# Allegro board pc043b_single_maroc_17.brd
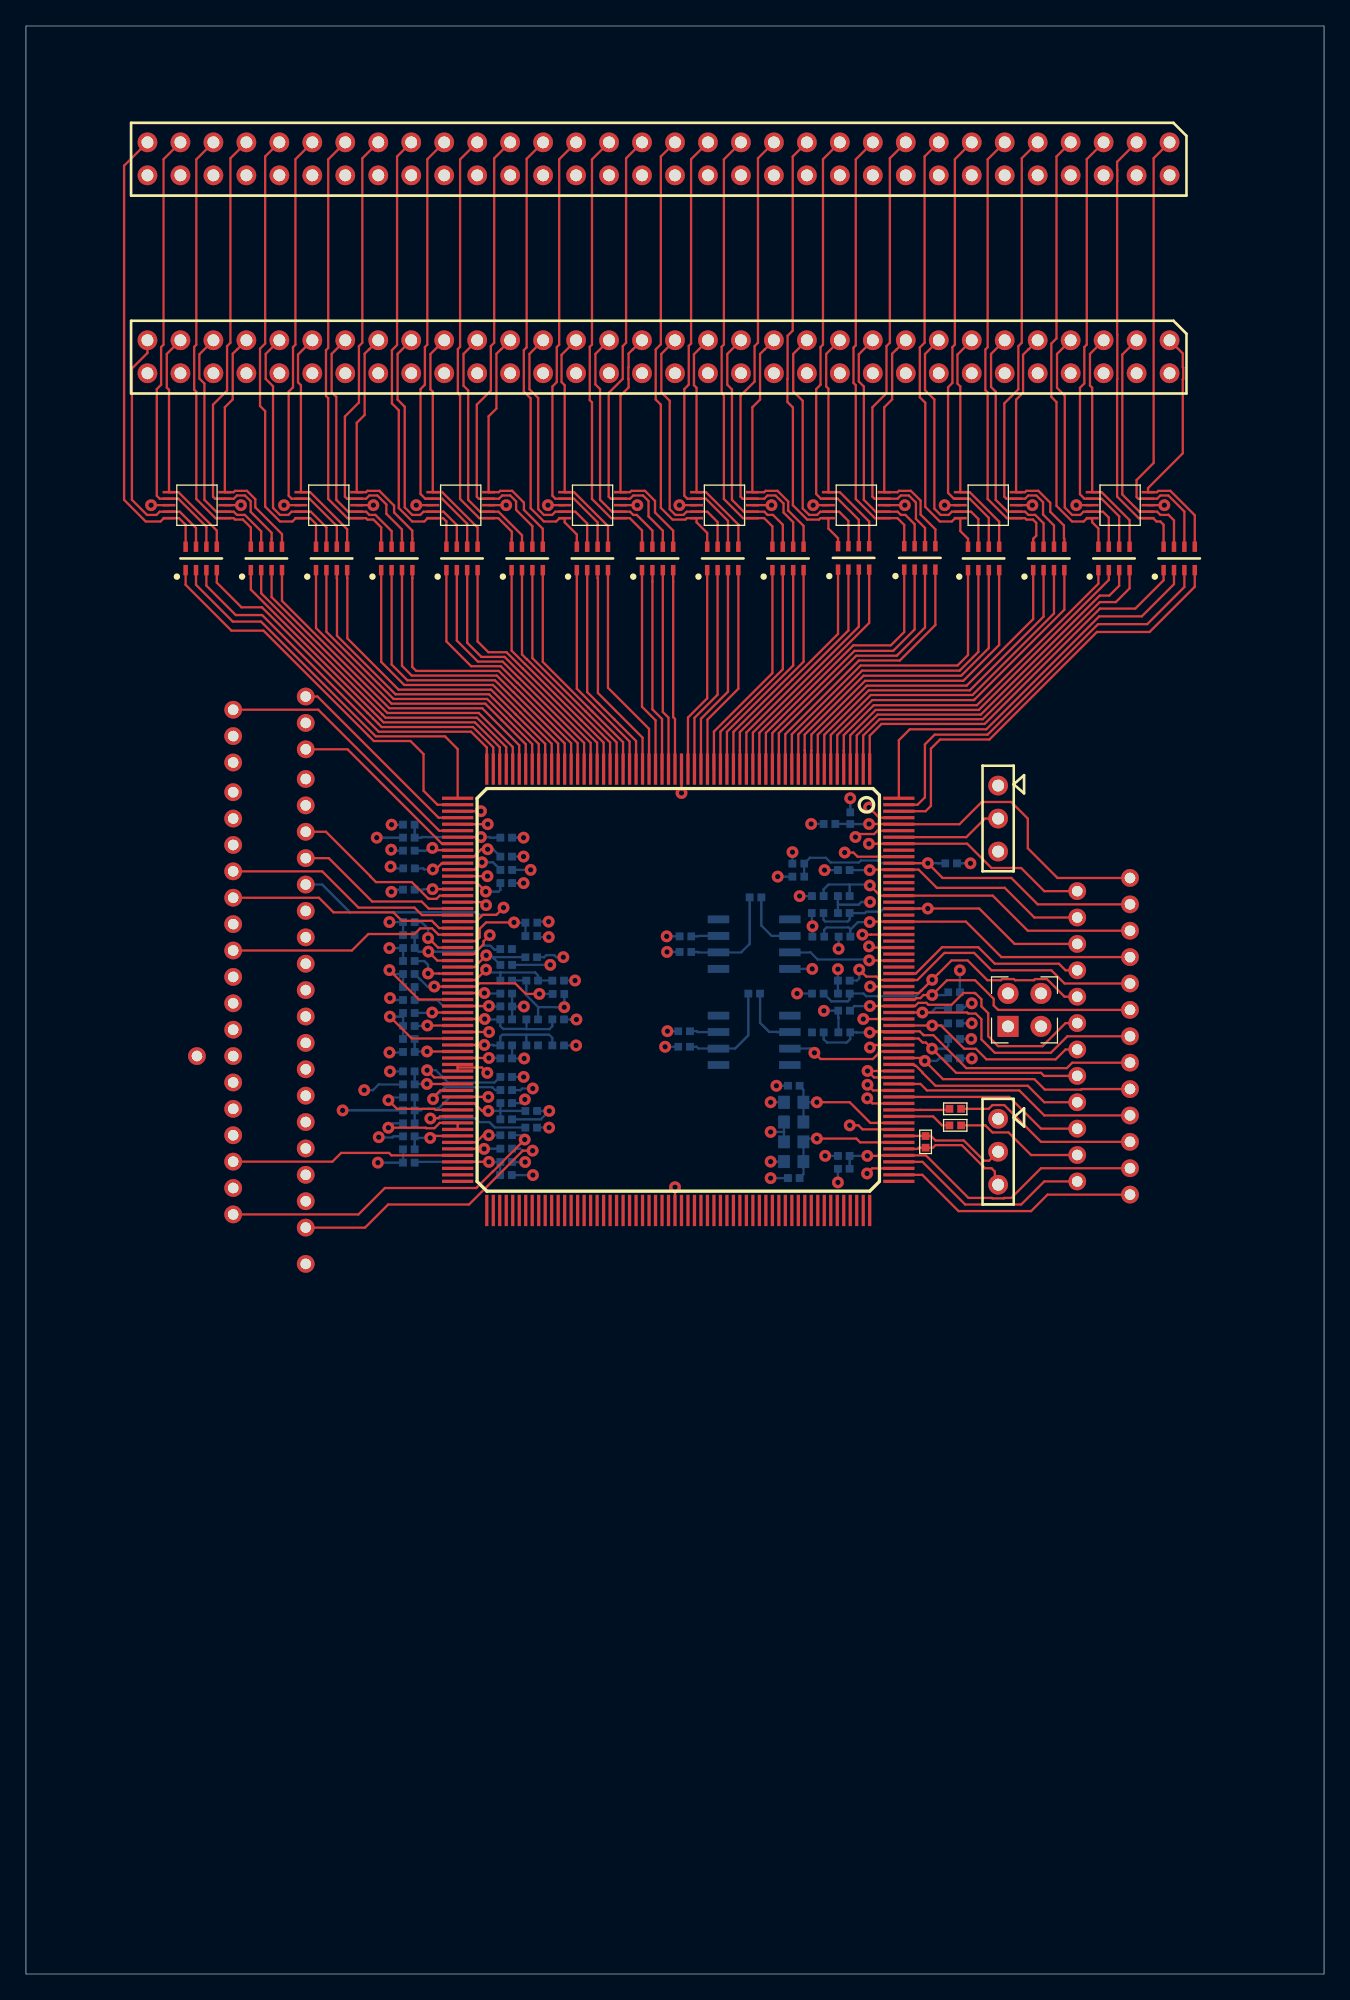
[diagram p0: board, top side]
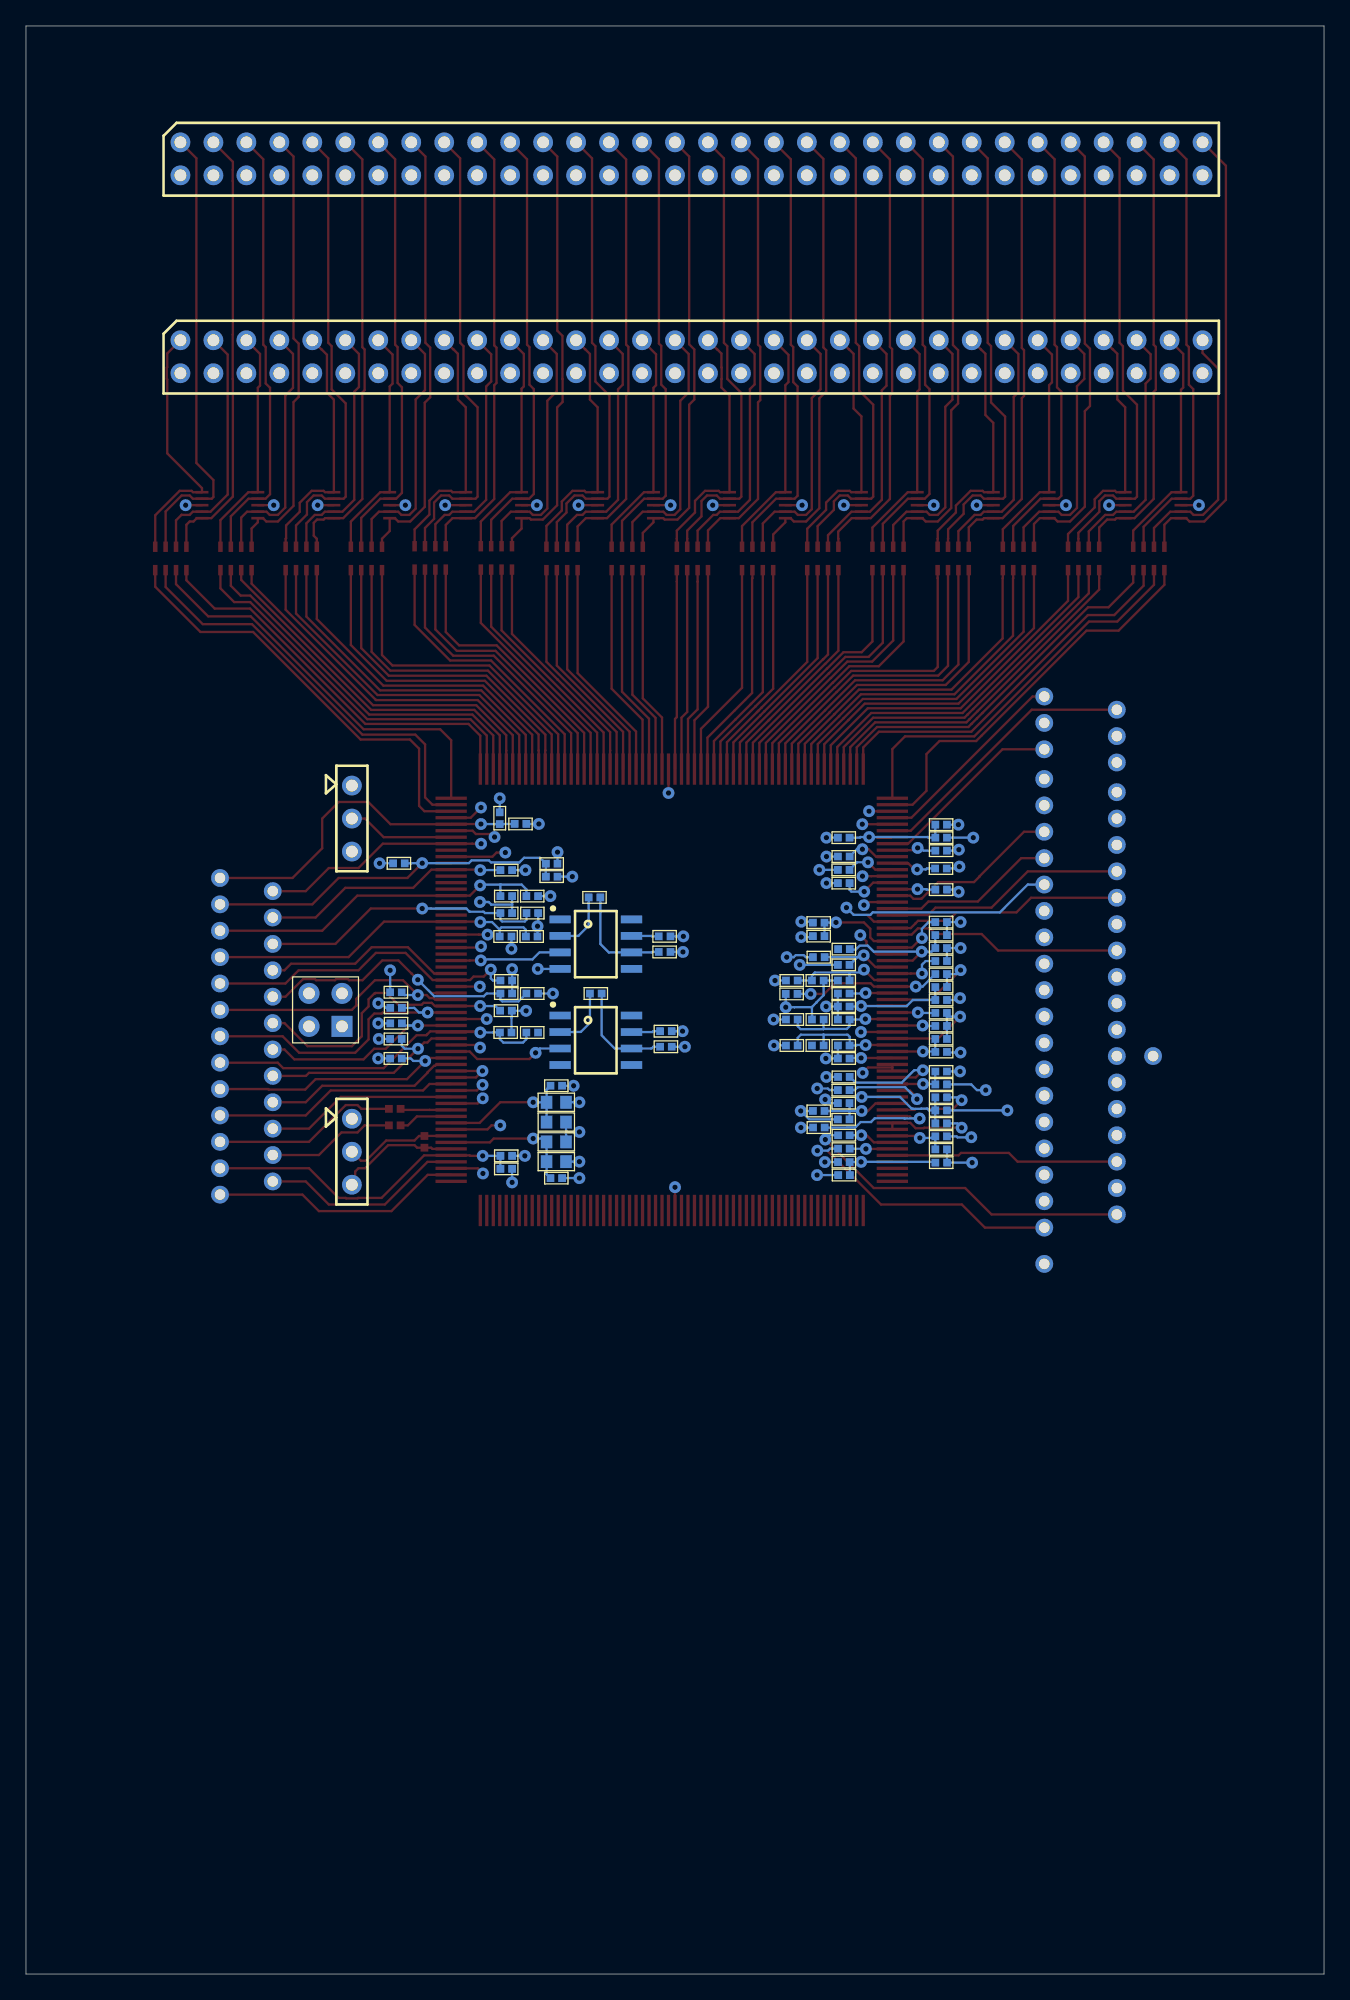
[diagram p1: board, bottom side, seen from below]

Outline 100 x 150 mm; copper layers: TOP, L2, L3, L4, L5, BOTTOM. Coordinates in mm from the lower left corner of the outline.
Outline path: 0,150 100,150 100,0 0,0 0,150

## Design rules (mm)
net group OR: nets OR<0> OR<1>
net group DC_BLOCKED_IN: nets DC_BLOCKED_IN<0> DC_BLOCKED_IN<1> DC_BLOCKED_IN<2> DC_BLOCKED_IN<3> DC_BLOCKED_IN<4> DC_BLOCKED_IN<5> DC_BLOCKED_IN<6> DC_BLOCKED_IN<7> DC_BLOCKED_IN<8> DC_BLOCKED_IN<9> DC_BLOCKED_IN<10> DC_BLOCKED_IN<11> DC_BLOCKED_IN<12> DC_BLOCKED_IN<13> DC_BLOCKED_IN<14> DC_BLOCKED_IN<15> DC_BLOCKED_IN<16> DC_BLOCKED_IN<17> DC_BLOCKED_IN<18> DC_BLOCKED_IN<19> DC_BLOCKED_IN<20> DC_BLOCKED_IN<21> DC_BLOCKED_IN<22> DC_BLOCKED_IN<23> DC_BLOCKED_IN<24> DC_BLOCKED_IN<25> DC_BLOCKED_IN<26> DC_BLOCKED_IN<27> DC_BLOCKED_IN<28> DC_BLOCKED_IN<29> DC_BLOCKED_IN<30> DC_BLOCKED_IN<31> DC_BLOCKED_IN<32> DC_BLOCKED_IN<33> DC_BLOCKED_IN<34> DC_BLOCKED_IN<35> DC_BLOCKED_IN<36> DC_BLOCKED_IN<37> DC_BLOCKED_IN<38> DC_BLOCKED_IN<39> DC_BLOCKED_IN<40> DC_BLOCKED_IN<41> DC_BLOCKED_IN<42> DC_BLOCKED_IN<43> DC_BLOCKED_IN<44> DC_BLOCKED_IN<45> DC_BLOCKED_IN<46> DC_BLOCKED_IN<47> DC_BLOCKED_IN<48> DC_BLOCKED_IN<49> DC_BLOCKED_IN<50> DC_BLOCKED_IN<51> DC_BLOCKED_IN<52> DC_BLOCKED_IN<53> DC_BLOCKED_IN<54> DC_BLOCKED_IN<55> DC_BLOCKED_IN<56> DC_BLOCKED_IN<57> DC_BLOCKED_IN<58> DC_BLOCKED_IN<59> DC_BLOCKED_IN<60> DC_BLOCKED_IN<61> DC_BLOCKED_IN<62> DC_BLOCKED_IN<63>
net group IN: nets IN<0> IN<1> IN<2> IN<3> IN<4> IN<5> IN<6> IN<7> IN<8> IN<9> IN<10> IN<11> IN<12> IN<13> IN<14> IN<15> IN<16> IN<17> IN<18> IN<19> IN<20> IN<21> IN<22> IN<23> IN<24> IN<25> IN<26> IN<27> IN<28> IN<29> IN<30> IN<31> IN<32> IN<33> IN<34> IN<35> IN<36> IN<37> IN<38> IN<39> IN<40> IN<41> IN<42> IN<43> IN<44> IN<45> IN<46> IN<47> IN<48> IN<49> IN<50> IN<51> IN<52> IN<53> IN<54> IN<55> IN<56> IN<57> IN<58> IN<59> IN<60> IN<61> IN<62> IN<63>
net group SUM: nets SUM<1> SUM<2> SUM<3> SUM<4> SUM<5> SUM<6> SUM<7> SUM<8>
net group TRIG: nets TRIG<0> TRIG<1> TRIG<2> TRIG<3> TRIG<4> TRIG<5> TRIG<6> TRIG<7> TRIG<8> TRIG<9> TRIG<10> TRIG<11> TRIG<12> TRIG<13> TRIG<14> TRIG<15> TRIG<16> TRIG<17> TRIG<18> TRIG<19> TRIG<20> TRIG<21> TRIG<22> TRIG<23> TRIG<24> TRIG<25> TRIG<26> TRIG<27> TRIG<28> TRIG<29> TRIG<30> TRIG<31> TRIG<32> TRIG<33> TRIG<34> TRIG<35> TRIG<36> TRIG<37> TRIG<38> TRIG<39> TRIG<40> TRIG<41> TRIG<42> TRIG<43> TRIG<44> TRIG<45> TRIG<46> TRIG<47> TRIG<48> TRIG<49> TRIG<50> TRIG<51> TRIG<52> TRIG<53> TRIG<54> TRIG<55> TRIG<56> TRIG<57> TRIG<58> TRIG<59> TRIG<60> TRIG<61> TRIG<62> TRIG<63>

## Placement (name value [footprint] x y rotation side)
C1  100nF  [C0402]  63 63 180 bottom
C2  100nF  [C0402]  29.5 63.5 0 bottom
C3  100nF  [C0402]  38.92 78.3 180 bottom
C4  100nF  [C0402]  63.5 89 270 bottom
C5  100nF  [C0402]  63 83 0 bottom
C6  100nF  [C0402]  29.5 88.5 0 bottom
C7  100nF  [C0402]  63 81.69 0 bottom
C8  100nF  [C0402]  29.5 87.5 0 bottom
C9  100nF  [C0402]  38.93 79.92 180 bottom
C10  100nF  [C0402]  63.05 79.89 0 bottom
C11  100nF  [C0402]  29.5 72 0 bottom
C12  100nF  [C0402]  63 75.5 0 bottom
C13  100nF  [C0402]  29.5 77 0 bottom
C14  100nF  [C0402]  29.5 69.5 0 bottom
C15  100nF  [C0402]  29.5 67.5 0 bottom
C16  100nF  [C0402]  63.04 72.5 0 bottom
C17  100nF  [C0402]  29.5 65.5 0 bottom
C18  100nF  [C0402]  29.5 86.5 0 bottom
C19  100nF  [C0402]  37 71.5 180 bottom
C20  100nF  [C0402]  29.5 83.5 0 bottom
C21  100nF  [C0402]  37 73.5 180 bottom
C22  100nF  [C0402]  29.5 78 0 bottom
C23  100nF  [C0402]  63.02 74.18 0 bottom
C24  100nF  [C0402]  29.5 80 0 bottom
C25  100nF  [C0402]  71.5 70.5 180 bottom
C26  100nF  [C0402]  29.5 73 0 bottom
C27  100nF  [C0402]  37 75.5 180 bottom
C28  100nF  [C0402]  37 84 180 bottom
C29  100nF  [C0402]  37 76.5 0 bottom
C30  100nF  [C0402]  37 68.06 180 bottom
C31  100nF  [C0402]  71.5 75.6 180 bottom
C32  100nF  [C0402]  37 86.05 180 bottom
C33  100nF  [C0402]  37 74.5 180 bottom
C34  100nF  [C0402]  38.93 66.46 180 bottom
C35  100nF  [C0402]  63 76.5 0 bottom
C36  100nF  [C0402]  37.01 85.02 180 bottom
C37  100nF  [C0402]  71.5 72 180 bottom
C38  100nF  [C0402]  71.27 85.53 180 bottom
C39  100nF  [C0402]  29.51 85.13 0 bottom
C40  100nF  [C0402]  29.5 81 0 bottom
C41  100nF  [C0402]  37 70.5 180 bottom
C42  100nF  [C0402]  71.49 74.39 180 bottom
C43  100nF  [C0402]  63 85 0 bottom
C44  100nF  [C0402]  36.99 62.52 180 bottom
C45  100nF  [C0402]  36.99 69.08 180 bottom
C46  100nF  [C0402]  71.49 73.21 180 bottom
C47  100nF  [C0402]  29.5 74 0 bottom
C48  100nF  [C0402]  50.7 72.6 180 bottom
C49  100nF  [C0402]  50.8 79.9 180 bottom
C50  100nF  [C0402]  59.14 61.28 0 bottom
C51  100nF  [C0402]  59.14 68.4 0 bottom
CN1  100nF/16V  [CAPCAF80P160X320X110-8N]  13.5 109 90 top
CN2  100nF/16V  [CAPCAF80P160X320X110-8N]  18.52 109 90 top
CN3  100nF/16V  [CAPCAF80P160X320X110-8N]  23.55 109 90 top
CN4  100nF/16V  [CAPCAF80P160X320X110-8N]  28.57 109 90 top
CN5  100nF/16V  [CAPCAF80P160X320X110-8N]  33.59 109 90 top
CN6  100nF/16V  [CAPCAF80P160X320X110-8N]  38.61 109 90 top
CN7  100nF/16V  [CAPCAF80P160X320X110-8N]  43.64 109 90 top
CN8  100nF/16V  [CAPCAF80P160X320X110-8N]  48.66 109 90 top
CN9  100nF/16V  [CAPCAF80P160X320X110-8N]  53.68 109 90 top
CN10  100nF/16V  [CAPCAF80P160X320X110-8N]  58.7 109 90 top
CN11  100nF/16V  [CAPCAF80P160X320X110-8N]  63.76 109.04 90 top
CN12  100nF/16V  [CAPCAF80P160X320X110-8N]  68.86 109.04 90 top
CN13  100nF/16V  [CAPCAF80P160X320X110-8N]  73.77 109 90 top
CN14  100nF/16V  [CAPCAF80P160X320X110-8N]  78.8 109 90 top
CN15  100nF/16V  [CAPCAF80P160X320X110-8N]  83.82 109 90 top
CN16  100nF/16V  [CAPCAF80P160X320X110-8N]  88.84 109 90 top
IC1  -  [SOIC127P598X200-8N]  56.1 71.9 180 bottom
IC2  -  [SOIC127P598X200-8N]  56.1 79.3 180 bottom
J1  -  [CONHE13D2X32M]  88.1 141.04 90 top
J2  -  [CONHE13D2X32M]  88.1 125.8 90 top
J3  -  [CONHE13D3X1M]  74.89 65.86 270 top
J4  -  [CONHE13D3X1M]  74.89 91.51 270 top
LK1  -  [1-HOLE_0-8P]  85.05 62.05 0 top
LK2  -  [1-HOLE_0-8P]  21.55 63.57 0 top
LK3  -  [1-HOLE_0-8P]  15.96 86.94 0 top
LK4  -  [1-HOLE_0-8P]  85.05 84.4 0 top
LK5  -  [1-HOLE_0-8P]  85.05 80.33 0 top
LK6  -  [1-HOLE_0-8P]  80.99 83.38 0 top
LK7  -  [1-HOLE_0-8P]  80.99 79.32 0 top
LK8  -  [1-HOLE_0-8P]  15.96 88.97 0 top
LK9  -  [1-HOLE_0-8P]  85.05 78.3 0 top
LK10  -  [1-HOLE_0-8P]  80.99 75.25 0 top
LK11  -  [1-HOLE_0-8P]  15.96 76.78 0 top
LK12  -  [1-HOLE_0-8P]  21.55 69.67 0 top
LK13  -  [1-HOLE_0-8P]  85.05 70.17 0 top
LK14  -  [1-HOLE_0-8P]  15.96 66.62 0 top
LK15  -  [1-HOLE_0-8P]  21.55 61.54 0 top
LK16  -  [1-HOLE_0-8P]  21.55 92.02 0 top
LK17  -  [1-HOLE_0-8P]  15.96 68.65 0 top
LK18  -  [1-HOLE_0-8P]  21.55 89.99 0 top
LK19  -  [1-HOLE_0-8P]  21.55 71.7 0 top
LK20  -  [1-HOLE_0-8P]  21.55 77.79 0 top
LK21  -  [1-HOLE_0-8P]  80.99 73.22 0 top
LK22  -  [1-HOLE_0-8P]  15.96 80.84 0 top
LK23  -  [1-HOLE_0-8P]  85.05 68.14 0 top
LK24  -  [1-HOLE_0-8P]  15.96 72.71 0 top
LK25  -  [1-HOLE_0-8P]  21.55 75.76 0 top
LK26  -  [1-HOLE_0-8P]  85.05 60.01 0 top
LK27  -  [1-HOLE_0-8P]  15.96 70.68 0 top
LK28  -  [1-HOLE_0-8P]  85.05 66.11 0 top
LK29  -  [1-HOLE_0-8P]  80.99 65.09 0 top
LK30  -  [1-HOLE_0-8P]  13.17 70.68 0 top
LK31  -  [1-HOLE_0-8P]  15.96 93.29 0 top
LK32  -  [1-HOLE_0-8P]  21.55 79.83 0 top
LK33  -  [1-HOLE_0-8P]  21.55 65.6 0 top
LK34  -  [1-HOLE_0-8P]  85.05 74.24 0 top
LK35  -  [1-HOLE_0-8P]  21.55 96.34 0 top
LK36  -  [1-HOLE_0-8P]  15.96 74.75 0 top
LK37  -  [1-HOLE_0-8P]  15.96 60.52 0 top
LK38  -  [1-HOLE_0-8P]  85.05 76.27 0 top
LK39  -  [1-HOLE_0-8P]  15.96 95.32 0 top
LK40  -  [1-HOLE_0-8P]  80.99 69.16 0 top
LK41  -  [1-HOLE_0-8P]  85.05 82.37 0 top
LK42  -  [1-HOLE_0-8P]  15.96 91 0 top
LK43  -  [1-HOLE_0-8P]  21.55 81.86 0 top
LK44  -  [1-HOLE_0-8P]  15.96 64.59 0 top
LK45  -  [1-HOLE_0-8P]  85.05 72.21 0 top
LK46  -  [1-HOLE_0-8P]  80.99 81.35 0 top
LK47  -  [1-HOLE_0-8P]  21.55 59.51 0 top
LK48  -  [1-HOLE_0-8P]  21.55 67.63 0 top
LK49  -  [1-HOLE_0-8P]  80.99 71.19 0 top
LK50  -  [1-HOLE_0-8P]  21.55 73.73 0 top
LK51  -  [1-HOLE_0-8P]  80.99 63.06 0 top
LK52  -  [1-HOLE_0-8P]  85.05 64.08 0 top
LK53  -  [1-HOLE_0-8P]  21.55 83.89 0 top
LK54  -  [1-HOLE_0-8P]  15.96 58.49 0 top
LK55  -  [1-HOLE_0-8P]  21.55 54.68 0 top
LK56  -  [1-HOLE_0-8P]  21.55 57.47 0 top
LK57  -  [1-HOLE_0-8P]  21.55 94.3 0 top
LK58  -  [1-HOLE_0-8P]  80.99 77.29 0 top
LK59  -  [1-HOLE_0-8P]  15.96 62.55 0 top
LK60  -  [1-HOLE_0-8P]  21.55 98.37 0 top
LK61  -  [1-HOLE_0-8P]  21.55 87.95 0 top
LK62  -  [1-HOLE_0-8P]  15.96 84.91 0 top
LK63  -  [1-HOLE_0-8P]  80.99 67.13 0 top
LK64  -  [1-HOLE_0-8P]  21.55 85.92 0 top
LK65  -  [1-HOLE_0-8P]  15.96 82.87 0 top
LK66  -  [1-HOLE_0-8P]  15.96 97.35 0 top
LK67  -  [1-HOLE_0-8P]  15.96 78.81 0 top
LK68  -  [1-HOLE_0-8P]  80.99 61.03 0 top
PL1  -  [HEADER2X2_STR]  75.65 72.97 90 bottom
R1  51  [C0402]  71.59 65.35 0 top
R2  51  [C0402]  71.59 66.62 0 top
R3  10R  [C0402]  63 62 180 bottom
R4  10R  [C0402]  29.5 64.5 180 bottom
R5  10R  [C0402]  37 77.71 0 bottom
R6  10R  [C0402]  61.9 88.56 180 bottom
R7  10R  [C0402]  61 83 180 bottom
R8  10R  [C0402]  37 87.5 0 bottom
R9  10R  [C0402]  60.99 81.69 180 bottom
R10  10R  [C0402]  38.93 80.96 0 bottom
R11  10R  [C0402]  61.04 79.89 180 bottom
R12  10R  [C0402]  29.5 71 180 bottom
R13  10R  [C0402]  61 75.5 180 bottom
R14  100  [C0402]  41.02 75.47 0 bottom
R15  10R  [C0402]  29.5 68.5 180 bottom
R16  10R  [C0402]  29.5 66.5 180 bottom
R17  100  [C0402]  61 72.5 180 bottom
R18  51  [C0402]  36.99 64.59 180 bottom
R19  51  [C0402]  36.99 63.55 180 bottom
R20  XX  [C0402]  39 71.5 0 bottom
R21  XX  [C0402]  41 71.5 180 bottom
R22  XX  [C0402]  39 73.5 0 bottom
R23  XX  [C0402]  41 73.5 180 bottom
R24  100  [C0402]  69.3 64.08 270 top
R25  XX  [C0402]  36.99 78.92 0 bottom
R26  XX  [C0402]  29.5 79 0 bottom
R27  1k  [C0402]  38.92 65.18 0 bottom
R28  XX  [C0402]  39 76.5 180 bottom
R29  XX  [C0402]  41 76.5 180 bottom
R30  XX  [C0402]  29.5 75 180 bottom
R31  XX  [C0402]  29.5 76 0 bottom
R32  XX  [C0402]  37 67.06 0 bottom
R33  XX  [C0402]  37 65.81 180 bottom
R34  XX  [C0402]  59.5 85.5 180 bottom
R35  XX  [C0402]  59.5 84.5 0 bottom
R36  XX  [C0402]  36.98 61.52 0 bottom
R37  XX  [C0402]  29.49 62.48 0 bottom
R38  51R  [C0402]  56.1 75.5 180 bottom
R39  51R  [C0402]  56.2 82.9 180 bottom
R40  51R  [C0402]  50.7 71.4 180 bottom
R41  51R  [C0402]  50.8 78.7 180 bottom
R42  XX  [C0603]  59.14 64.08 180 bottom
R43  00  [C0603]  59.14 62.55 0 bottom
R44  680  [C0603]  59.14 65.6 180 bottom
R45  510  [C0603]  59.14 67.13 0 bottom
U1  -  [PQFP240_050]  65 92.78 270 top
U2  -  [SOT552-1]  84.29 113.1 0 top
U3  -  [SOT552-1]  74.13 113.1 0 top
U4  -  [SOT552-1]  63.97 113.1 0 top
U5  -  [SOT552-1]  53.81 113.1 0 top
U6  -  [SOT552-1]  43.65 113.1 0 top
U7  -  [SOT552-1]  33.49 113.1 0 top
U8  -  [SOT552-1]  23.33 113.1 0 top
U9  -  [SOT552-1]  13.17 113.1 0 top

## Library data of the parts
C1-C17 = CAPCERSMDCL2: part number: CAPCERSMDCL2_0402-100NF_X7R,16V; tolerance: 10%
C18-C51 = CAPCERSMDCL2: part number: CAPCERSMDCL2_0402-100NF,16V; tolerance: 10%
CN1-CN16 = CAPN4I: part number: CAPN4I-100NF,16V,X7R,CKCA43
IC1 IC2 = AD8061: part number: AD8061ARZ
J1 J2 = CON64P: part number: CON64P-BARD2X32
J3 J4 = CON3P: part number: CON3P-SIL254D
LK1-LK68 = 1-HOLE: part number: 1-HOLE_0-8-BASE
PL1 = HEADER2X2: part number: HEADER2X2_STR-HARWIN
R1 R2 R18 R19 = RSMD0402: part number: RSMD0402_1/16W-51,1%; tolerance: 1%
R3-R13 R15 R16 = RSMD0402: part number: RSMD0402_1/16W-10R,5%; tolerance: 5%
R14 R17 = RSMD0402: part number: RSMD0402_1/16W-100,0.1%_GEN; tolerance: 0.1%
R20-R23 R25 R26 R28-R37 = RSMD0402: part number: RSMD0402_0.0625W-XX,1%; tolerance: 1%
R24 = RSMD0402: part number: RSMD0402_1/16W-100,1%; tolerance: 1%
R27 = RSMD0402: part number: RSMD0402_1/16W-1K,5%; tolerance: 5%
R38-R41 = RSMD0402: part number: RSMD0402_1/16W-51R,5%; tolerance: 5%
R42 = RSMD0603: part number: RSMD0603_1/10W-XX,1%; tolerance: 1%
R43 = RSMD0603: part number: RSMD0603_-00,
R44 = RSMD0603: part number: RSMD0603_1/10W-680,1%; tolerance: 1%
R45 = RSMD0603: part number: RSMD0603_1/10W-510,1%; tolerance: 1%
U1 = MAROC3: part number: MAROC3_PQFP-IN2P3
U2-U9 = PRTR5V0U8S: part number: PRTR5V0U8S_TSSOP-NXP

## Footprints (pads in the part's own frame, mm; a bottom-side part is the same pattern mirrored in y, then rotated)
1-HOLE_0-8P
  round 1.372 hole 0.813: 1(0,0)
C0402
  rect 0.6x0.6 smd: 1(-0.45,0) 2(0.45,0)
C0603
  rect 0.9x1 smd: 1(-0.75,0) 2(0.75,0)
CAPCAF80P160X320X110-8N
  rect 0.8x0.35 smd: 1(-0.9,1.2) 2(0.9,1.2) 3(-0.9,0.4) 4(0.9,0.4) 5(-0.9,-0.4) 6(0.9,-0.4) 7(-0.9,-1.2) 8(0.9,-1.2)
CONHE13D2X32M
  round 1.524 hole 0.914: 1(0,0) 2(-2.54,0) 3(0,2.54) 4(-2.54,2.54) 5(0,5.08) 6(-2.54,5.08) 7(0,7.62) 8(-2.54,7.62) 9(0,10.16) 10(-2.54,10.16) 11(0,12.7) 12(-2.54,12.7) 13(0,15.24) 14(-2.54,15.24) 15(0,17.78) 16(-2.54,17.78) 17(0,20.32) 18(-2.54,20.32) 19(0,22.86) 20(-2.54,22.86) 21(0,25.4) 22(-2.54,25.4) 23(0,27.94) 24(-2.54,27.94) 25(0,30.48) 26(-2.54,30.48) 27(0,33.02) 28(-2.54,33.02) 29(0,35.56) 30(-2.54,35.56) 31(0,38.1) 32(-2.54,38.1) 33(0,40.64) 34(-2.54,40.64) 35(0,43.18) 36(-2.54,43.18) 37(0,45.72) 38(-2.54,45.72) 39(0,48.26) 40(-2.54,48.26) 41(0,50.8) 42(-2.54,50.8) 43(0,53.34) 44(-2.54,53.34) 45(0,55.88) 46(-2.54,55.88) 47(0,58.42) 48(-2.54,58.42) 49(0,60.96) 50(-2.54,60.96) 51(0,63.5) 52(-2.54,63.5) 53(0,66.04) 54(-2.54,66.04) 55(0,68.58) 56(-2.54,68.58) 57(0,71.12) 58(-2.54,71.12) 59(0,73.66) 60(-2.54,73.66) 61(0,76.2) 62(-2.54,76.2) 63(0,78.74) 64(-2.54,78.74)
CONHE13D3X1M
  round 1.524 hole 0.914: 1(0,0) 2(2.54,0) 3(5.08,0)
HEADER2X2_STR
  rect 1.626x1.626 hole 0.914: 1(0,0)
  round 1.626 hole 0.914: 2(0,2.54) 3(2.54,0) 4(2.54,2.54)
PQFP240_050
  rect 2.413x0.254 smd: 1(0,0) 2(0,-0.5) 3(0,-1) 4(0,-1.5) 5(0,-2) 6(0,-2.5) 7(0,-3) 8(0,-3.5) 9(0,-4) 10(0,-4.5) 11(0,-5) 12(0,-5.5) 13(0,-6) 14(0,-6.5) 15(0,-7) 16(0,-7.5) 17(0,-8) 18(0,-8.5) 19(0,-9) 20(0,-9.5) 21(0,-10) 22(0,-10.5) 23(0,-11) 24(0,-11.5) 25(0,-12) 26(0,-12.5) 27(0,-13) 28(0,-13.5) 29(0,-14) 30(0,-14.5) 31(0,-15) 32(0,-15.5) 33(0,-16) 34(0,-16.5) 35(0,-17) 36(0,-17.5) 37(0,-18) 38(0,-18.5) 39(0,-19) 40(0,-19.5) 41(0,-20) 42(0,-20.5) 43(0,-21) 44(0,-21.5) 45(0,-22) 46(0,-22.5) 47(0,-23) 48(0,-23.5) 49(0,-24) 50(0,-24.5) 51(0,-25) 52(0,-25.5) 53(0,-26) 54(0,-26.5) 55(0,-27) 56(0,-27.5) 57(0,-28) 58(0,-28.5) 59(0,-29) 60(0,-29.5) 121(33.987,-29.5) 122(33.987,-29) 123(33.987,-28.5) 124(33.987,-28) 125(33.987,-27.5) 126(33.987,-27) 127(33.987,-26.5) 128(33.987,-26) 129(33.987,-25.5) 130(33.987,-25) 131(33.987,-24.5) 132(33.987,-24) 133(33.987,-23.5) 134(33.987,-23) 135(33.987,-22.5) 136(33.987,-22) 137(33.987,-21.5) 138(33.987,-21) 139(33.987,-20.5) 140(33.987,-20) 141(33.987,-19.5) 142(33.987,-19) 143(33.987,-18.5) 144(33.987,-18) 145(33.987,-17.5) 146(33.987,-17) 147(33.987,-16.5) 148(33.987,-16) 149(33.987,-15.5) 150(33.987,-15) 151(33.987,-14.5) 152(33.987,-14) 153(33.987,-13.5) 154(33.987,-13) 155(33.987,-12.5) 156(33.987,-12) 157(33.987,-11.5) 158(33.987,-11) 159(33.987,-10.5) 160(33.987,-10) 161(33.987,-9.5) 162(33.987,-9) 163(33.987,-8.5) 164(33.987,-8) 165(33.987,-7.5) 166(33.987,-7) 167(33.987,-6.5) 168(33.987,-6) 169(33.987,-5.5) 170(33.987,-5) 171(33.987,-4.5) 172(33.987,-4) 173(33.987,-3.5) 174(33.987,-3) 175(33.987,-2.5) 176(33.987,-2) 177(33.987,-1.5) 178(33.987,-1) 179(33.987,-0.5) 180(33.987,0)
  rect 0.254x2.413 smd: 61(2.244,-31.744) 62(2.744,-31.744) 63(3.244,-31.744) 64(3.744,-31.744) 65(4.244,-31.744) 66(4.744,-31.744) 67(5.244,-31.744) 68(5.744,-31.744) 69(6.244,-31.744) 70(6.744,-31.744) 71(7.244,-31.744) 72(7.744,-31.744) 73(8.243,-31.744) 74(8.743,-31.744) 75(9.243,-31.744) 76(9.743,-31.744) 77(10.243,-31.744) 78(10.743,-31.744) 79(11.243,-31.744) 80(11.743,-31.744) 81(12.243,-31.744) 82(12.743,-31.744) 83(13.243,-31.744) 84(13.743,-31.744) 85(14.243,-31.744) 86(14.743,-31.744) 87(15.243,-31.744) 88(15.743,-31.744) 89(16.244,-31.744) 90(16.744,-31.744) 91(17.244,-31.744) 92(17.744,-31.744) 93(18.244,-31.744) 94(18.744,-31.744) 95(19.244,-31.744) 96(19.744,-31.744) 97(20.244,-31.744) 98(20.744,-31.744) 99(21.244,-31.744) 100(21.744,-31.744) 101(22.244,-31.744) 102(22.744,-31.744) 103(23.244,-31.744) 104(23.744,-31.744) 105(24.244,-31.744) 106(24.744,-31.744) 107(25.244,-31.744) 108(25.744,-31.744) 109(26.244,-31.744) 110(26.744,-31.744) 111(27.244,-31.744) 112(27.744,-31.744) 113(28.244,-31.744) 114(28.744,-31.744) 115(29.244,-31.744) 116(29.744,-31.744) 117(30.244,-31.744) 118(30.744,-31.744) 119(31.244,-31.744) 120(31.744,-31.744) 181(31.744,2.244) 182(31.244,2.244) 183(30.744,2.244) 184(30.244,2.244) 185(29.744,2.244) 186(29.244,2.244) 187(28.744,2.244) 188(28.244,2.244) 189(27.744,2.244) 190(27.244,2.244) 191(26.744,2.244) 192(26.244,2.244) 193(25.744,2.244) 194(25.244,2.244) 195(24.744,2.244) 196(24.244,2.244) 197(23.744,2.244) 198(23.244,2.244) 199(22.744,2.244) 200(22.244,2.244) 201(21.744,2.244) 202(21.244,2.244) 203(20.744,2.244) 204(20.244,2.244) 205(19.744,2.244) 206(19.244,2.244) 207(18.744,2.244) 208(18.244,2.244) 209(17.744,2.244) 210(17.244,2.244) 211(16.744,2.244) 212(16.244,2.244) 213(15.743,2.244) 214(15.243,2.244) 215(14.743,2.244) 216(14.243,2.244) 217(13.743,2.244) 218(13.243,2.244) 219(12.743,2.244) 220(12.243,2.244) 221(11.743,2.244) 222(11.243,2.244) 223(10.743,2.244) 224(10.243,2.244) 225(9.743,2.244) 226(9.243,2.244) 227(8.743,2.244) 228(8.243,2.244) 229(7.744,2.244) 230(7.244,2.244) 231(6.744,2.244) 232(6.244,2.244) 233(5.744,2.244) 234(5.244,2.244) 235(4.744,2.244) 236(4.244,2.244) 237(3.744,2.244) 238(3.244,2.244) 239(2.744,2.244) 240(2.244,2.244)
SOIC127P598X200-8N
  rect 1.65x0.6 smd: 1(-2.75,1.905) 2(-2.75,0.635) 3(-2.75,-0.635) 4(-2.75,-1.905) 5(2.75,-1.905) 6(2.75,-0.635) 7(2.75,0.635) 8(2.75,1.905)
SOT552-1
  rect 1x0.2 smd: 1(-2.15,1) 2(-2.15,0.5) 3(-2.15,0) 4(-2.15,-0.5) 5(-2.15,-1) 6(2.15,-1) 7(2.15,-0.5) 8(2.15,0) 9(2.15,0.5) 10(2.15,1)

## Nets
AVDD: C29.2(B<0>) C48.1(A<0>) C49.1(A<0>) IC1.7(PVS) IC2.7(PVS) R5.2(B<0>) R6.2(B<0>) R7.2(B<0>) R8.2(B<0>) R9.2(B<0>) R10.2(B<0>) R11.2(B<0>) R12.2(B<0>) R13.2(B<0>) R14.2(B<0>) R15.2(B<0>) R16.2(B<0>) R17.2(B<0>) R20.2(B<0>) R22.2(B<0>) R25.2(B<0>) R27.2(B<0>) R28.2(B<0>) R30.2(B<0>) R32.2(B<0>) R34.2(B<0>) R36.2(B<0>)
DVDD: R3.2(B<0>) R4.2(B<0>) R42.2(B<0>) R44.2(B<0>)
GND_SIGNAL: C1.2(B<0>) C2.1(A<0>) C3.1(A<0>) C4.1(A<0>) C5.1(A<0>) C6.1(A<0>) C7.1(A<0>) C8.1(A<0>) C9.1(A<0>) C10.1(A<0>) C11.1(A<0>) C12.1(A<0>) C13.1(A<0>) C14.1(A<0>) C15.1(A<0>) C16.1(A<0>) C17.1(A<0>) C18.1(A<0>) C19.1(A<0>) C20.1(A<0>) C21.1(A<0>) C22.1(A<0>) C23.1(A<0>) C24.1(A<0>) C25.1(A<0>) C26.1(A<0>) C27.1(A<0>) C28.1(A<0>) C30.1(A<0>) C31.1(A<0>) C32.1(A<0>) C33.1(A<0>) C34.1(A<0>) C35.1(A<0>) C36.1(A<0>) C37.1(A<0>) C38.1(A<0>) C39.1(A<0>) C40.1(A<0>) C41.1(A<0>) C42.1(A<0>) C43.1(A<0>) C44.1(A<0>) C45.1(A<0>) C46.1(A<0>) C47.1(A<0>) C48.2(B<0>) C49.2(B<0>) C50.1(A<0>) C51.1(A<0>) IC1.4(MVS) IC2.4(MVS) J1.2(A<1>) J1.4(A<3>) J1.6(A<5>) J1.8(A<7>) J1.10(A<9>) J1.12(A<11>) J1.14(A<13>) J1.16(A<15>) J1.18(A<17>) J1.20(A<19>) J1.22(A<21>) J1.24(A<23>) J1.26(A<25>) J1.28(A<27>) J1.30(A<29>) J1.32(A<31>) J1.34(A<33>) J1.36(A<35>) J1.38(A<37>) J1.40(A<39>) J1.42(A<41>) J1.44(A<43>) J1.46(A<45>) J1.48(A<47>) J1.50(A<49>) J1.52(A<51>) J1.54(A<53>) J1.56(A<55>) J1.58(A<57>) J1.60(A<59>) J1.62(A<61>) J1.64(A<63>) J2.2(A<1>) J2.4(A<3>) J2.6(A<5>) J2.8(A<7>) J2.10(A<9>) J2.12(A<11>) J2.14(A<13>) J2.16(A<15>) J2.18(A<17>) J2.20(A<19>) J2.22(A<21>) J2.24(A<23>) J2.26(A<25>) J2.28(A<27>) J2.30(A<29>) J2.32(A<31>) J2.34(A<33>) J2.36(A<35>) J2.38(A<37>) J2.40(A<39>) J2.42(A<41>) J2.44(A<43>) J2.46(A<45>) J2.48(A<47>) J2.50(A<49>) J2.52(A<51>) J2.54(A<53>) J2.56(A<55>) J2.58(A<57>) J2.60(A<59>) J2.62(A<61>) J2.64(A<63>) J3.1(A<0>) J4.3(A<2>) LK30.1(A<0>) LK55.1(A<0>) PL1.2(B1<0>) PL1.4(B2<0>) R21.1(A<0>) R23.1(A<0>) R26.1(A<0>) R29.1(A<0>) R31.1(A<0>) R33.1(A<0>) R35.1(A<0>) R37.1(A<0>) R43.1(A<0>) R45.1(A<0>) U1.30(GND_PA2) U1.63(GND_PA) U1.65(VSSA) U1.73(GND_NMOS) U1.77(GND_W) U1.85(GND_DAC) U1.92(E_FSU) U1.98(GND_WILK) U1.102(VSSA2) U1.103(VSSM) U1.109(GND_DISCRI) U1.111(VSSD) U1.112(GNDD) U1.150(VSSD2) U1.183(GNDD2) U1.189(VSSD3) U1.195(GND_DISCRI2) U1.197(VSSM2) U1.198(VSS) U1.202(GND_FSU) U1.206(GND_FSB1) U1.211(GND_FSB0) U1.217(GND_CAPA) U1.219(GND_SS) U1.227(GND_OTAG) U1.231(GND_NMOS2) U1.235(VSSI) U1.237(GND_PA3) U2.3 U2.8 U3.3 U3.8 U4.3 U4.8 U5.3 U5.8 U6.3 U6.8 U7.3 U7.8 U8.3 U8.8 U9.3 U9.8
VDD_BUF1: C7.2(B<0>) LK7.1(A<0>) R9.1(A<0>) U1.223(VDD_BUF1)
VDD_DAC: C3.2(B<0>) LK3.1(A<0>) R5.1(A<0>) U1.87(VDD_DAC)
VDD_DISCRI: C14.2(B<0>) LK14.1(A<0>) R15.1(A<0>) U1.105(VDD_DISCRI)
VDD_DISCRIADC: C15.2(B<0>) C17.2(B<0>) LK15.1(A<0>) R16.1(A<0>) U1.107(VDD_DISCRIADC) U1.193(VDD_DISCRIADC2)
VDD_FSB: C12.2(B<0>) LK10.1(A<0>) R13.1(A<0>) U1.210(VDD_FSB)
VDD_FSU1: C13.2(B<0>) LK11.1(A<0>) R14.1(A<0>) U1.90(VDD_FSU1)
VDD_FSU2: C16.2(B<0>) LK13.1(A<0>) R17.1(A<0>) U1.204(VDD_FSU2)
VDD_OTAG: C5.2(B<0>) LK5.1(A<0>) R7.1(A<0>) U1.225(VDD_OTAG)
VDD_PA: C6.2(B<0>) C8.2(B<0>) LK6.1(A<0>) R8.1(A<0>) U1.67(VDD_PA) U1.233(VDD_PA2)
VDD_PAD: C4.2(B<0>) LK4.1(A<0>) R6.1(A<0>) U1.236(VDD_PAD)
VDD_SS: C10.2(B<0>) LK9.1(A<0>) R11.1(A<0>) U1.221(VDD_SS)
VDD_W: C9.2(B<0>) LK8.1(A<0>) R10.1(A<0>) U1.83(VDD_W)
VDD_WILK: C11.2(B<0>) LK12.1(A<0>) R12.1(A<0>) U1.100(VDD_WILK)
VDDD: C1.1(A<0>) LK1.1(A<0>) R3.1(A<0>) U1.185(VDDD)
VDDD2: C2.2(B<0>) LK2.1(A<0>) R4.1(A<0>) U1.113(VDDD2)
ADC_DAV: LK54.1(A<0>) R18.1(A<0>)
BUF_OUT_FS: PL1.1(A1<0>) R40.2(B<0>)
BUF_OUT_Q: PL1.3(A2<0>) R41.2(B<0>)
CK_40M: J3.2(A<1>) R24.1(A<0>) U1.188(CK_40M)
CK_R: LK64.1(A<0>) U1.78(CK_R)
CK_SC: LK57.1(A<0>) U1.68(CK_SC)
CKB_40M: J3.3(A<2>) R24.2(B<0>) U1.186(CKB_40M)
CTEST: J4.1(A<0>)
D_R: LK67.1(A<0>) U1.82(D_R)
D_SC: LK60.1(A<0>) U1.64(D_SC)
DC_BLOCKED_IN<0>: CN16.7(A<0>) U1.238(IN0)
DC_BLOCKED_IN<1>: CN16.5(A<0>) U1.239(IN1)
DC_BLOCKED_IN<2>: CN16.3(A<0>) U1.240(IN2)
DC_BLOCKED_IN<3>: CN16.1(A<0>) U1.1(IN3)
DC_BLOCKED_IN<4>: CN15.7(A<0>) U1.2(IN4)
DC_BLOCKED_IN<5>: CN15.5(A<0>) U1.3(IN5)
DC_BLOCKED_IN<6>: CN15.3(A<0>) U1.4(IN6)
DC_BLOCKED_IN<7>: CN15.1(A<0>) U1.5(IN7)
DC_BLOCKED_IN<8>: CN14.7(A<0>) U1.6(IN8)
DC_BLOCKED_IN<9>: CN14.5(A<0>) U1.7(IN9)
DC_BLOCKED_IN<10>: CN14.3(A<0>) U1.8(IN10)
DC_BLOCKED_IN<11>: CN14.1(A<0>) U1.9(IN11)
DC_BLOCKED_IN<12>: CN13.7(A<0>) U1.10(IN12)
DC_BLOCKED_IN<13>: CN13.5(A<0>) U1.11(IN13)
DC_BLOCKED_IN<14>: CN13.3(A<0>) U1.12(IN14)
DC_BLOCKED_IN<15>: CN13.1(A<0>) U1.13(IN15)
DC_BLOCKED_IN<16>: CN12.7(A<0>) U1.14(IN16)
DC_BLOCKED_IN<17>: CN12.5(A<0>) U1.15(IN17)
DC_BLOCKED_IN<18>: CN12.3(A<0>) U1.16(IN18)
DC_BLOCKED_IN<19>: CN12.1(A<0>) U1.17(IN19)
DC_BLOCKED_IN<20>: CN11.7(A<0>) U1.18(IN20)
DC_BLOCKED_IN<21>: CN11.5(A<0>) U1.19(IN21)
DC_BLOCKED_IN<22>: CN11.3(A<0>) U1.20(IN22)
DC_BLOCKED_IN<23>: CN11.1(A<0>) U1.21(IN23)
DC_BLOCKED_IN<24>: CN10.7(A<0>) U1.22(IN24)
DC_BLOCKED_IN<25>: CN10.5(A<0>) U1.23(IN25)
DC_BLOCKED_IN<26>: CN10.3(A<0>) U1.24(IN26)
DC_BLOCKED_IN<27>: CN10.1(A<0>) U1.25(IN27)
DC_BLOCKED_IN<28>: CN9.7(A<0>) U1.26(IN28)
DC_BLOCKED_IN<29>: CN9.5(A<0>) U1.27(IN29)
DC_BLOCKED_IN<30>: CN9.3(A<0>) U1.28(IN30)
DC_BLOCKED_IN<31>: CN9.1(A<0>) U1.29(IN31)
DC_BLOCKED_IN<32>: CN8.7(A<0>) U1.31(IN32)
DC_BLOCKED_IN<33>: CN8.5(A<0>) U1.32(IN33)
DC_BLOCKED_IN<34>: CN8.3(A<0>) U1.33(IN34)
DC_BLOCKED_IN<35>: CN8.1(A<0>) U1.34(IN35)
DC_BLOCKED_IN<36>: CN7.7(A<0>) U1.35(IN36)
DC_BLOCKED_IN<37>: CN7.5(A<0>) U1.36(IN37)
DC_BLOCKED_IN<38>: CN7.3(A<0>) U1.37(IN38)
DC_BLOCKED_IN<39>: CN7.1(A<0>) U1.38(IN39)
DC_BLOCKED_IN<40>: CN6.7(A<0>) U1.39(IN40)
DC_BLOCKED_IN<41>: CN6.5(A<0>) U1.40(IN41)
DC_BLOCKED_IN<42>: CN6.3(A<0>) U1.41(IN42)
DC_BLOCKED_IN<43>: CN6.1(A<0>) U1.42(IN43)
DC_BLOCKED_IN<44>: CN5.7(A<0>) U1.43(IN44)
DC_BLOCKED_IN<45>: CN5.5(A<0>) U1.44(IN45)
DC_BLOCKED_IN<46>: CN5.3(A<0>) U1.45(IN46)
DC_BLOCKED_IN<47>: CN5.1(A<0>) U1.46(IN47)
DC_BLOCKED_IN<48>: CN4.7(A<0>) U1.47(IN48)
DC_BLOCKED_IN<49>: CN4.5(A<0>) U1.48(IN49)
DC_BLOCKED_IN<50>: CN4.3(A<0>) U1.49(IN50)
DC_BLOCKED_IN<51>: CN4.1(A<0>) U1.50(IN51)
DC_BLOCKED_IN<52>: CN3.7(A<0>) U1.51(IN52)
DC_BLOCKED_IN<53>: CN3.5(A<0>) U1.52(IN53)
DC_BLOCKED_IN<54>: CN3.3(A<0>) U1.53(IN54)
DC_BLOCKED_IN<55>: CN3.1(A<0>) U1.54(IN55)
DC_BLOCKED_IN<56>: CN2.7(A<0>) U1.55(IN56)
DC_BLOCKED_IN<57>: CN2.5(A<0>) U1.56(IN57)
DC_BLOCKED_IN<58>: CN2.3(A<0>) U1.57(IN58)
DC_BLOCKED_IN<59>: CN2.1(A<0>) U1.58(IN59)
DC_BLOCKED_IN<60>: CN1.7(A<0>) U1.59(IN60)
DC_BLOCKED_IN<61>: CN1.5(A<0>) U1.60(IN61)
DC_BLOCKED_IN<62>: CN1.3(A<0>) U1.61(IN62)
DC_BLOCKED_IN<63>: CN1.1(A<0>) U1.62(IN63)
EN_OTAG: LK58.1(A<0>) U1.213(EN_OTAG)
G_DIODE: C27.2(B<0>) LK25.1(A<0>) U1.91(G_DIODE)
HOLD1: LK62.1(A<0>) U1.79(HOLD1)
HOLD2: LK65.1(A<0>) U1.81(HOLD2)
IB_INTEG: C41.2(B<0>) LK44.1(A<0>) U1.101(IB_INTEG)
IB_SUM: C35.2(B<0>) LK38.1(A<0>) U1.212(IB_SUM)
IB_W: C31.2(B<0>) LK34.1(A<0>) U1.209(IB_W)
IBI_BUF: C28.2(B<0>) LK31.1(A<0>) U1.74(IBI_BUF)
IBI_SS: C32.2(B<0>) LK35.1(A<0>) U1.70(IBI_SS)
IBO_DAC: C40.2(B<0>) LK43.1(A<0>) U1.84(IBO_DAC)
IBO_SS: C36.2(B<0>) LK39.1(A<0>) U1.72(IBO_SS)
IN<0>: CN16.8(B<0>) J2.1(A<0>) U2.10(IN)
IN<1>: CN16.6(B<0>) J1.1(A<0>) U2.9(IN)
IN<2>: CN16.4(B<0>) J2.3(A<2>) U2.7(IN)
IN<3>: CN16.2(B<0>) J1.3(A<2>) U2.6(IN)
IN<4>: CN15.8(B<0>) J2.5(A<4>) U2.1(IN)
IN<5>: CN15.6(B<0>) J1.5(A<4>) U2.2(IN)
IN<6>: CN15.4(B<0>) J2.7(A<6>) U2.4(IN)
IN<7>: CN15.2(B<0>) J1.7(A<6>) U2.5(IN)
IN<8>: CN14.8(B<0>) J2.9(A<8>) U3.10(IN)
IN<9>: CN14.6(B<0>) J1.9(A<8>) U3.9(IN)
IN<10>: CN14.4(B<0>) J2.11(A<10>) U3.7(IN)
IN<11>: CN14.2(B<0>) J1.11(A<10>) U3.6(IN)
IN<12>: CN13.8(B<0>) J2.13(A<12>) U3.1(IN)
IN<13>: CN13.6(B<0>) J1.13(A<12>) U3.2(IN)
IN<14>: CN13.4(B<0>) J2.15(A<14>) U3.4(IN)
IN<15>: CN13.2(B<0>) J1.15(A<14>) U3.5(IN)
IN<16>: CN12.8(B<0>) J2.17(A<16>) U4.10(IN)
IN<17>: CN12.6(B<0>) J1.17(A<16>) U4.9(IN)
IN<18>: CN12.4(B<0>) J2.19(A<18>) U4.7(IN)
IN<19>: CN12.2(B<0>) J1.19(A<18>) U4.6(IN)
IN<20>: CN11.8(B<0>) J2.21(A<20>) U4.1(IN)
IN<21>: CN11.6(B<0>) J1.21(A<20>) U4.2(IN)
IN<22>: CN11.4(B<0>) J2.23(A<22>) U4.4(IN)
IN<23>: CN11.2(B<0>) J1.23(A<22>) U4.5(IN)
IN<24>: CN10.8(B<0>) J2.25(A<24>) U5.10(IN)
IN<25>: CN10.6(B<0>) J1.25(A<24>) U5.9(IN)
IN<26>: CN10.4(B<0>) J2.27(A<26>) U5.7(IN)
IN<27>: CN10.2(B<0>) J1.27(A<26>) U5.6(IN)
IN<28>: CN9.8(B<0>) J2.29(A<28>) U5.1(IN)
IN<29>: CN9.6(B<0>) J1.29(A<28>) U5.2(IN)
IN<30>: CN9.4(B<0>) J2.31(A<30>) U5.4(IN)
IN<31>: CN9.2(B<0>) J1.31(A<30>) U5.5(IN)
IN<32>: CN8.8(B<0>) J2.33(A<32>) U6.10(IN)
IN<33>: CN8.6(B<0>) J1.33(A<32>) U6.9(IN)
IN<34>: CN8.4(B<0>) J2.35(A<34>) U6.7(IN)
IN<35>: CN8.2(B<0>) J1.35(A<34>) U6.6(IN)
IN<36>: CN7.8(B<0>) J2.37(A<36>) U6.1(IN)
IN<37>: CN7.6(B<0>) J1.37(A<36>) U6.2(IN)
IN<38>: CN7.4(B<0>) J2.39(A<38>) U6.4(IN)
IN<39>: CN7.2(B<0>) J1.39(A<38>) U6.5(IN)
IN<40>: CN6.8(B<0>) J2.41(A<40>) U7.10(IN)
IN<41>: CN6.6(B<0>) J1.41(A<40>) U7.9(IN)
IN<42>: CN6.4(B<0>) J2.43(A<42>) U7.7(IN)
IN<43>: CN6.2(B<0>) J1.43(A<42>) U7.6(IN)
IN<44>: CN5.8(B<0>) J2.45(A<44>) U7.1(IN)
IN<45>: CN5.6(B<0>) J1.45(A<44>) U7.2(IN)
IN<46>: CN5.4(B<0>) J2.47(A<46>) U7.4(IN)
IN<47>: CN5.2(B<0>) J1.47(A<46>) U7.5(IN)
IN<48>: CN4.8(B<0>) J2.49(A<48>) U8.10(IN)
IN<49>: CN4.6(B<0>) J1.49(A<48>) U8.9(IN)
IN<50>: CN4.4(B<0>) J2.51(A<50>) U8.7(IN)
IN<51>: CN4.2(B<0>) J1.51(A<50>) U8.6(IN)
IN<52>: CN3.8(B<0>) J2.53(A<52>) U8.1(IN)
IN<53>: CN3.6(B<0>) J1.53(A<52>) U8.2(IN)
IN<54>: CN3.4(B<0>) J2.55(A<54>) U8.4(IN)
IN<55>: CN3.2(B<0>) J1.55(A<54>) U8.5(IN)
IN<56>: CN2.8(B<0>) J2.57(A<56>) U9.10(IN)
IN<57>: CN2.6(B<0>) J1.57(A<56>) U9.9(IN)
IN<58>: CN2.4(B<0>) J2.59(A<58>) U9.7(IN)
IN<59>: CN2.2(B<0>) J1.59(A<58>) U9.6(IN)
IN<60>: CN1.8(B<0>) J2.61(A<60>) U9.1(IN)
IN<61>: CN1.6(B<0>) J1.61(A<60>) U9.2(IN)
IN<62>: CN1.4(B<0>) J2.63(A<62>) U9.4(IN)
IN<63>: CN1.2(B<0>) J1.63(A<62>) U9.5(IN)
IREF_DAC: C24.2(B<0>) LK22.1(A<0>) R25.1(A<0>) R26.2(B<0>) U1.86(IREF_DAC)
OR<0>: LK51.1(A<0>) R1.2(B<0>)
OR<1>: LK52.1(A<0>) R2.2(B<0>)
OUT_ADC: LK56.1(A<0>) R19.1(A<0>)
OUT_FS: IC1.3(PIN) U1.201(OUT_FS)
OUT_Q: IC2.3(PIN) U1.215(OUT_Q)
PWR_ON: R27.1(A<0>) U1.110(PWR_ON)
QBUF_R: LK61.1(A<0>) U1.76(QBUF_R)
QBUF_SC: LK63.1(A<0>) U1.199(QBUF_SC)
RAMP: LK27.1(A<0>) U1.97(RAMP)
RSTB_R: LK53.1(A<0>) U1.80(RSTB_R)
RSTN_ADC: LK68.1(A<0>) U1.184(RSTN_ADC)
RSTN_SC: LK66.1(A<0>) U1.66(RSTN_SC)
START_ADCB: LK59.1(A<0>) U1.116(START_ADCB)
SUM<1>: U1.228(SUM1)
SUM<2>: U1.226(SUM2)
SUM<3>: U1.224(SUM3)
SUM<4>: U1.222(SUM4)
SUM<5>: U1.220(SUM5)
SUM<6>: U1.218(SUM6)
SUM<7>: U1.216(SUM7)
SUM<8>: U1.214(SUM8)
TRIG<0>: LK26.1(A<0>) U1.182(OUT0)
TRIG<1>: U1.181(OUT1)
TRIG<2>: U1.180(OUT2)
TRIG<3>: U1.179(OUT3)
TRIG<4>: U1.178(OUT4)
TRIG<5>: U1.177(OUT5)
TRIG<6>: U1.176(OUT6)
TRIG<7>: U1.175(OUT7)
TRIG<8>: U1.174(OUT8)
TRIG<9>: U1.173(OUT9)
TRIG<10>: U1.172(OUT10)
TRIG<11>: U1.171(OUT11)
TRIG<12>: U1.170(OUT12)
TRIG<13>: U1.169(OUT13)
TRIG<14>: U1.168(OUT14)
TRIG<15>: U1.167(OUT15)
TRIG<16>: U1.166(OUT16)
TRIG<17>: U1.165(OUT17)
TRIG<18>: U1.164(OUT18)
TRIG<19>: U1.163(OUT19)
TRIG<20>: U1.162(OUT20)
TRIG<21>: U1.161(OUT21)
TRIG<22>: U1.160(OUT22)
TRIG<23>: U1.159(OUT23)
TRIG<24>: U1.158(OUT24)
TRIG<25>: U1.157(OUT25)
TRIG<26>: U1.156(OUT26)
TRIG<27>: U1.155(OUT27)
TRIG<28>: U1.154(OUT28)
TRIG<29>: U1.153(OUT29)
TRIG<30>: U1.152(OUT30)
TRIG<31>: U1.151(OUT31)
TRIG<32>: U1.149(OUT32)
TRIG<33>: U1.148(OUT33)
TRIG<34>: U1.147(OUT34)
TRIG<35>: U1.146(OUT35)
TRIG<36>: U1.145(OUT36)
TRIG<37>: U1.144(OUT37)
TRIG<38>: U1.143(OUT38)
TRIG<39>: U1.142(OUT39)
TRIG<40>: U1.141(OUT40)
TRIG<41>: U1.140(OUT41)
TRIG<42>: U1.139(OUT42)
TRIG<43>: U1.138(OUT43)
TRIG<44>: U1.137(OUT44)
TRIG<45>: U1.136(OUT45)
TRIG<46>: U1.135(OUT46)
TRIG<47>: U1.134(OUT47)
TRIG<48>: U1.133(OUT48)
TRIG<49>: U1.132(OUT49)
TRIG<50>: U1.131(OUT50)
TRIG<51>: U1.130(OUT51)
TRIG<52>: U1.129(OUT52)
TRIG<53>: U1.128(OUT53)
TRIG<54>: U1.127(OUT54)
TRIG<55>: U1.126(OUT55)
TRIG<56>: U1.125(OUT56)
TRIG<57>: U1.124(OUT57)
TRIG<58>: U1.123(OUT58)
TRIG<59>: U1.122(OUT59)
TRIG<60>: U1.121(OUT60)
TRIG<61>: U1.120(OUT61)
TRIG<62>: U1.119(OUT62)
TRIG<63>: U1.118(OUT63)
UNNAMED_1_MAROC3_I1_OR0: R1.1(A<0>) U1.191(OR_0)
UNNAMED_1_MAROC3_I1_OR1: R2.1(A<0>) U1.192(OR_1)
UNNAMED_3_CON3P_I231_A: J4.2(A<1>) U1.234(CTEST)
UNNAMED_3_MAROC3_I1_ADCDAV: R18.2(B<0>) U1.114(ADC_DAV)
UNNAMED_3_MAROC3_I1_OUTADC: R19.2(B<0>) U1.115(OUT_ADC)
UNNAMED_8_AD8061_I1_MIN: IC1.2(MIN) R38.1(A<0>)
UNNAMED_8_AD8061_I1_VOUT: IC1.6(VOUT) R38.2(B<0>) R40.1(A<0>)
UNNAMED_8_AD8061_I11_MIN: IC2.2(MIN) R39.1(A<0>)
UNNAMED_8_AD8061_I11_VOUT: IC2.6(VOUT) R39.2(B<0>) R41.1(A<0>)
V_BG: C25.2(B<0>) LK23.1(A<0>) U1.200(V_BG)
VB_OTAFSU: C37.2(B<0>) LK40.1(A<0>) U1.203(VB_OTAFSU)
VBI_DISCRI: C45.2(B<0>) LK48.1(A<0>) U1.104(VBI_DISCRI)
VBI_DISCRIADC: C44.2(B<0>) LK47.1(A<0>) R36.1(A<0>) R37.2(B<0>) U1.117(VBI_DISCRIADC)
VBI_FSB: C42.2(B<0>) LK45.1(A<0>) U1.207(VBI_FSB)
VBI_PA: C38.2(B<0>) LK41.1(A<0>) R34.1(A<0>) R35.2(B<0>) U1.230(VBI_PA)
VBI_TZ: C29.1(A<0>) LK32.1(A<0>) R28.1(A<0>) R29.2(B<0>) U1.89(VBI_TZ)
VBM_DISCRI: C30.2(B<0>) LK33.1(A<0>) U1.106(VBM_DISCRI)
VBO_DISCRI: C34.2(B<0>) LK37.1(A<0>) R32.1(A<0>) R33.2(B<0>) U1.108(VBO_DISCRI)
VBO_FSB: C46.2(B<0>) LK49.1(A<0>) U1.205(VBO_FSB)
VBO_TZ: C33.2(B<0>) LK36.1(A<0>) R30.1(A<0>) R31.2(B<0>) U1.93(VBO_TZ)
VCASC_FSU: C47.2(B<0>) LK50.1(A<0>) U1.94(VCASC_FSU)
VCASC_NMOS: C43.2(B<0>) LK46.1(A<0>) U1.229(VCASC_NMOS)
VCASC_PMOS: C39.2(B<0>) LK42.1(A<0>) U1.71(VCASC_PMOS)
VGAIN_PA: C18.2(B<0>) LK16.1(A<0>) U1.69(VGAIN_PA)
VH: C51.2(B<0>) R44.1(A<0>) R45.2(B<0>) U1.190(VH)
VL: C50.2(B<0>) R42.1(A<0>) R43.2(B<0>) U1.187(VL)
VREF_DAC: C22.2(B<0>) LK20.1(A<0>) U1.88(VREF_DAC)
VREF_FSB: C23.2(B<0>) LK21.1(A<0>) U1.208(VREF_FSB)
VREF_FSU: C26.2(B<0>) LK24.1(A<0>) U1.96(VREF_FSU)
VREF_RAMP: C19.2(B<0>) LK17.1(A<0>) R20.1(A<0>) R21.2(B<0>) U1.99(VREF_RAMP)
VREF_SS: C20.2(B<0>) LK18.1(A<0>) U1.75(VREF_SS)
VSLOPE: C21.2(B<0>) LK19.1(A<0>) R22.1(A<0>) R23.2(B<0>) U1.95(VSLOPE)
VTH0: LK28.1(A<0>) U1.196(VTH0)
VTH1: LK29.1(A<0>) U1.194(VTH1)

Pads without a net: IC1 1 5 8; IC2 1 5 8; U1 232

## Via types
v1: diameter 0.914, hole 0.406, TOP to BOTTOM, 164 vias

## Routing (per net, layer and track width the routed paths; a pad name or vN(x,y) marks a point on that pad's centre or on a via; arc(x,y) is an arc through that point)
AVDD: length 36
  BOTTOM w0.18: R15.2 27.17,68.5 26.73,68.06 v1(26.06,68.06) ; R32.2 38.15,67.06 v1(38.43,67.34) ; C49.1 51.77,79.9 51.8,79.94 53.35,79.94 ; v1(24.4,66.5) R16.2 ; R8.2 v1(38.33,87.5) ; R34.2 v1(59.05,86.38) ; C29.2 R28.2 38.55,75.37 39.11,74.81 39.11,74.8 39.45,74.46 39.45,74.45 ; R5.2 v1(40.39,77.71) ; R27.2 v1(40.3,65.18) ; R10.2 39.46,81.03 v1(40.27,81.03) ; R30.2 28.19,75 v1(28.05,75.15) ; R12.2 29.01,70.96 v1(28,70.96) ; IC1.7 51.73,72.53 51.67,72.6 C48.1 ; R9.2 60.54,80.73 v1(60.59,80.68) R11.2 ; R36.2 v1(39.06,61.52) ; R13.2 v1(59.41,75.5) ; 39.45,74.45 40.79,74.45 40.79,74.44 v1(41.47,74.44) R14.2 ; 39.45,74.45 R22.2 ; R7.2 v1(59.6,83) ; R6.2 v1(60.49,88.56)
DVDD: length 5.5
  BOTTOM w0.18: v1(27.18,64.43) 27.59,64.43 27.61,64.42 28.23,64.42 28.31,64.5 R4.2 ; R3.2 v1(62.55,60.96) ; 58.39,64.84 v1(57.37,64.84) ; 58.39,64.84 R44.2 ; 58.39,64.84 R42.2
GND_SIGNAL: length 171.4
  TOP w0.18: U7.3 v1(30.07,113.1) ; U1.202 65.21,71.54 v1(65.02,71.34) ; U1.231 64.06,86.04 63.75,86.35 v1(63.07,86.35) ; v1(35.55,84.53) 34.88,84.53 34.88,84.54 U1.73 ; v1(64.8,61.64) 65.19,62.04 U1.183 ; U5.8 v1(57.44,113.1) ; 33.26,65.49 33.2,65.54 31.88,65.54 31.46,65.13 30.84,65.13 30.8,65.17 v1(27.92,65.17) ; 33.26,65.49 U1.111 ; 33.26,65.49 U1.112 ; U1.198 v1(64.83,69.54) 65.33,69.04 U1.197 ; 33.26,69.8 35.13,69.8 v1(35.54,69.39) ; 33.26,69.8 U1.102 ; 33.26,69.8 U1.103 ; U1.63 v1(35.05,89.54) ; U1.206 v1(64.5,73.54) ; v1(64.43,80.03) 65.11,80.03 65.11,80.04 U1.219 ; U1.65 v1(35.57,88.54) ; v1(64.95,89.82) 65.73,89.04 U1.237 ; U9.8 v1(16.56,113.1) ; U1.235 65.6,88.04 65.34,87.78 64.13,87.78 v1(63.9,87.55) ; U9.3 v1(9.64,113.1) ; U8.8 v1(26.76,113.1) ; v1(64.83,68.47) 64.83,68.47 65.26,68.04 U1.195 ; U1.30 v1(50.5,90.94) ; v1(28.04,73.72) 29.72,72.04 U1.98 ; v1(27.92,67.28) 28.58,66.62 31.46,66.62 31.55,66.54 U1.109 ; U8.3 v1(19.88,113.1) ; U1.189 64.45,65.04 64.14,65.35 v1(63.46,65.35) ; v1(28,77.3) 30.26,75.04 U1.92 ; U1.217 65.04,79.04 v1(64.95,79.13) ; U3.8 v1(77.53,113.1) ; U6.8 v1(47.1,113.1) ; U7.8 v1(37,113.1) ; U2.8 v1(87.7,113.1) ; v1(35.73,79.99) 35.25,79.52 35.25,79.29 34.5,78.54 U1.85 ; U4.3 v1(60.64,113.1) ; v1(35.45,82.31) 35.44,82.31 35.21,82.54 U1.77 ; U1.150 v1(50,60.58) ; U4.8 v1(67.71,113.1) ; U2.3 v1(80.91,113.1) ; U1.211 v1(65.04,76.04) ; U6.3 v1(40.21,113.1) ; U3.3 v1(70.77,113.1) ; U5.3 v1(50.34,113.1)
  BOTTOM w0.18: C37.1 v1(72.82,72) ; C18.1 28.21,86.5 v1(28.13,86.58) ; R31.1 C13.1 28.3,77 v1(28,77.3) ; C11.1 C26.1 29.05,73.67 ; C50.1 v1(57.37,61.28) ; 29.05,73.67 C47.1 ; 29.05,73.67 29,73.72 v1(28.04,73.72) ; v1(28.15,83.33) 28.32,83.5 C20.1 ; 62.55,82.34 62.55,82.34 64.16,82.34 64.16,82.35 64.35,82.55 v1(65.03,82.55) ; 62.55,82.34 62.55,82.48 62.55,82.48 C5.1 ; 62.55,82.34 C7.1 ; v1(27.92,65.17) 28.25,65.5 C17.1 ; C25.1 v1(72.87,70.5) ; C32.1 v1(38.33,86.05) ; v1(27.11,62.48) R37.1 29.05,62.49 C2.1 ; C4.1 v1(63.5,90.54) ; R21.1 v1(42.38,71.5) ; C10.1 v1(62.6,78.94) ; v1(27.92,67.28) 28.13,67.5 C15.1 ; R43.1 v1(57.37,62.55) ; C12.1 C35.1 v1(62.55,77.38) ; C36.1 v1(38.88,85.02) ; C19.1 C41.1 v1(38.38,70.5) ; C16.1 62.59,73.64 62.57,73.66 C23.1 v1(61.47,74.17) ; v1(72.86,73.21) C46.1 ; C8.1 v1(27.02,87.5) ; C28.1 v1(38.33,84) ; v1(72.86,74.75) 72.61,74.75 72.25,74.39 C42.1 ; C21.1 C33.1 ; C33.1 C27.1 ; C33.1 v1(38.36,74.5) ; C43.1 v1(61.52,85) ; v1(71.94,77.29) 71.94,76.12 71.95,76.12 C31.1 ; v1(28,79) R26.1 C22.1 ; C44.1 v1(38.46,62.52) ; C9.1 39.46,79.85 v1(40.28,79.85) ; C14.1 v1(28.04,69.5) ; C3.1 39.93,78.3 40.08,78.45 40.7,78.45 40.86,78.3 v1(41.4,78.3) ; R29.1 v1(42.3,76.5) ; C38.1 v1(72.76,85.53) ; R33.1 39.67,65.81 v1(40.31,66.46) C34.1 ; C49.2 v1(49.36,79.9) ; IC2.4 v1(60.57,77.39) ; C45.1 v1(38.34,69.08) ; C39.1 28.23,85.13 v1(28.09,85.27) ; v1(39.04,68.19) 38.22,68.19 38.1,68.06 C30.1 ; C48.2 v1(49.42,72.6) ; C6.1 v1(28.17,88.5) ; C24.1 C40.1 v1(28,81) ; R23.1 v1(42.41,73.5) ; R45.1 v1(57.37,67.13) ; C51.1 v1(57.81,68.4) ; C1.2 v1(61.57,63) ; R35.1 v1(57.91,84.5)
VDD_BUF1: length 24.2
  TOP w0.18: LK7.1 76.16,79.32 73.44,82.04 v1(69.47,82.04) 68.8,82.04 68.79,82.04 U1.223
  BOTTOM w0.18: R9.1 61.44,81.18 61.57,81.05 63.32,81.05 63.45,81.18 C7.2 64.64,81.69 64.74,81.8 65.83,81.8 66.07,82.04 v1(69.47,82.04)
VDD_DAC: length 30.1
  TOP w0.18: U1.87 34.56,77.54 v1(35.46,78.44)
  L3 w0.18: LK3.1 22.82,86.94 27.12,82.64 29.92,82.64 34.12,78.44 v1(35.46,78.44)
  BOTTOM w0.18: R5.1 36.1,78.16 36.09,78.16 35.81,78.44 v1(35.46,78.44) 35.6,78.3 C3.2
VDD_DISCRI: length 20.4
  TOP w0.18: v1(30.89,68.54) U1.105
  L3 w0.18: v1(30.89,68.54) 30.33,67.98 27.5,67.98 26.51,66.98 25.11,66.98 24.71,67.38 24.09,67.38 23.33,66.62 LK14.1
  BOTTOM w0.18: v1(30.89,68.54) 29.99,68.54 R15.1 C14.2
VDD_DISCRIADC: length 61.1
  TOP w0.18: U1.107 v1(35.62,67.54) ; U1.193 65.2,67.04 v1(64.81,67.43)
  L3 w0.18: v1(64.81,67.43) 63.08,69.16 55.84,69.16 54.11,67.43 39.88,67.43 38.9,66.45 37.99,66.45 36.91,67.54 v1(35.62,67.54) 29.62,61.54 LK15.1
  BOTTOM w0.18: C15.2 R16.1 ; R16.1 30.44,66.5 30.58,66.64 31.03,66.64 31.05,66.62 31.67,66.62 31.68,66.64 31.77,66.64 32.67,67.54 v1(35.62,67.54) ; R16.1 C17.2
VDD_FSB: length 25.8
  TOP w0.18: U1.210 68.78,75.54 68.99,75.74 69,75.74 v1(69.81,76.56) 70.29,77.04 70.29,77.04 71.31,78.05 72.54,78.05 74.07,76.52 75.11,76.52 75.2,76.61 76.11,76.61 76.2,76.52 77.65,76.52 77.74,76.61 78.65,76.61 80.01,75.25 LK10.1
  BOTTOM w0.18: v1(69.81,76.56) 68.54,75.29 64.73,75.29 64.52,75.5 C12.2 63.45,75.03 63.31,74.89 62.06,74.89 R13.1
VDD_FSU1: length 27.3
  TOP w0.18: v1(39.55,75.47) 38.5,75.47 37.69,76.28 34.93,76.28 34.68,76.04 U1.90 v1(31.45,76.04)
  L3 w0.18: LK11.1 25.44,76.78 25.62,76.6 29.11,76.6 29.68,76.04 v1(31.45,76.04)
  BOTTOM w0.18: v1(31.45,76.04) 30.92,76.04 30.41,76.55 30.4,76.55 C13.2 ; R14.1 v1(39.55,75.47)
VDD_FSU2: length 28.4
  TOP w0.18: LK13.1 80.6,70.17 80.18,69.75 72.44,69.75 69.91,72.29 69.15,72.29 69.1,72.34 68.86,72.59 65.09,72.59 65.04,72.54 ; 65.04,72.54 U1.204 ; 65.04,72.54 v1(65,72.5)
  BOTTOM w0.18: R17.1 61.45,71.98 61.71,71.72 63.23,71.72 63.49,71.99 C16.2 64.01,72.5 64.01,72.5 v1(65,72.5)
VDD_OTAG: length 26.6
  TOP w0.18: v1(65.01,83.82) 65.8,83.04 U1.225 74.48,83.04 77.18,80.33 LK5.1
  BOTTOM w0.18: v1(65.01,83.82) 64.95,83.89 63.44,83.89 ; R7.1 61.45,83.52 61.82,83.89 63.44,83.89 ; 63.44,83.89 63.45,83.88 C5.2
VDD_PA: length 58.3
  TOP w0.18: v1(64.94,87.03) 65.61,87.03 65.62,87.04 U1.233 72.51,87.04 74.38,85.16 76.67,85.16 78.45,83.38 LK6.1 ; v1(35.05,87.55) 34.73,87.55 34.72,87.54 U1.67
  L3 w0.18: v1(35.05,87.55) 36.17,87.55 36.92,86.8 38.71,86.8 39.85,85.66 61.19,85.66 61.23,85.7 61.81,85.7 61.85,85.66 63.57,85.66 v1(64.94,87.03)
  BOTTOM w0.18: C6.2 C8.2 30.47,87.5 30.51,87.55 v1(35.05,87.55) 35.72,87.55 35.77,87.5 R8.1
VDD_PAD: length 27.2
  TOP w0.18: LK4.1 79.46,84.4 77.18,86.68 77.18,88.97 75.9,90.25 73.63,90.25 71.92,88.54 U1.236 67.23,88.55 v1(64.95,88.55)
  BOTTOM w0.18: v1(64.95,88.55) C4.2 R6.1
VDD_SS: length 26.2
  TOP w0.18: LK9.1 75.15,78.3 72.41,81.04 U1.221 65.04,81.04 v1(65,81)
  BOTTOM w0.18: R11.1 61.49,80.41 61.67,80.59 63.38,80.59 63.5,80.47 63.5,80.41 ; v1(65,81) 64.1,81 63.5,80.41 ; C10.2 63.5,80.41
VDD_W: length 32.2
  TOP w0.18: U1.83 34.68,79.54 34.96,79.81 34.96,80.48 35.45,80.97 v1(37.6,80.97)
  L3 w0.18: v1(37.6,80.97) 32.6,80.97 29.37,84.2 27.39,84.2 22.62,88.97 LK8.1
  BOTTOM w0.18: C9.2 R10.1 37.96,80.96 37.95,80.97 v1(37.6,80.97)
VDD_WILK: length 14.2
  TOP w0.18: U1.100 v1(30.9,71.04)
  L3 w0.18: LK12.1 24.09,69.67 24.69,70.26 28.96,70.26 29.73,71.04 v1(30.9,71.04)
  BOTTOM w0.18: C11.2 R12.1 29.99,71.04 v1(30.9,71.04)
VDDD: length 25
  TOP w0.18: LK1.1 78.19,62.05 75.91,59.76 75.36,59.76 75.33,59.72 74.46,59.72 74.42,59.76 72.61,59.76 69.33,63.04 U1.185 65.82,63.04 65.78,63 v1(64.82,63)
  BOTTOM w0.18: v1(64.82,63) C1.1 R3.1
VDDD2: length 14.3
  TOP w0.18: v1(31.14,64.38) 31.29,64.53 31.54,64.53 31.54,64.54 U1.113
  L3 w0.18: v1(31.14,64.38) 28.92,64.38 28.11,63.57 LK2.1
  BOTTOM w0.18: C2.2 R4.1 30.07,64.38 v1(31.14,64.38)
ADC_DAV: length 26
  TOP w0.18: v1(38.42,64.25) 36.41,62.24 36.41,62.23 35.97,61.79 35.96,61.79 34.69,60.52 27.65,60.52 25.62,58.49 LK54.1
  BOTTOM w0.18: R18.1 38.09,64.59 v1(38.42,64.25)
BUF_OUT_FS: length 30
  L3 w0.18: v1(49.24,71.4) 49.68,71.84 49.68,71.88 52.61,74.8 60.47,74.8 60.92,75.25 68.8,75.25 69.32,74.73 69.34,74.73 70.09,73.98 74.64,73.98 PL1.1
  BOTTOM w0.18: R40.2 v1(49.24,71.4)
BUF_OUT_Q: length 29.1
  L3 w0.18: PL1.3 74.64,76.52 70.83,76.52 70.1,77.26 69.52,77.26 69.05,76.78 64.61,76.78 64.48,76.65 51.44,76.65 v1(49.39,78.7)
  BOTTOM w0.18: R41.2 v1(49.39,78.7)
CK_40M: length 8.9
  TOP w0.18: J3.2 74.2,62.62 73.81,62.62 72.25,64.18 70.07,64.18 69.72,64.53 69.48,64.53 ; 69.48,64.53 R24.1 ; 69.48,64.53 69.47,64.54 U1.188
CK_R: length 13.3
  TOP w0.18: U1.78 31.03,82.04 30.48,82.58 26.67,82.58 23.33,85.92 LK64.1
CK_SC: length 14.7
  TOP w0.18: LK57.1 24.77,94.3 32.04,87.04 U1.68
CKB_40M: length 9.5
  TOP w0.18: J3.3 74.64,61.03 74.64,61.79 74.38,62.05 73.88,62.05 72.1,63.82 70.07,63.82 69.87,63.63 R24.2 68.79,63.63 68.7,63.54 U1.186
D_R: length 18.2
  TOP w0.18: LK67.1 25.11,78.81 26.38,80.08 29.93,80.08 30.37,80.52 31.29,80.52 31.77,80.04 U1.82
D_SC: length 15.6
  TOP w0.18: LK60.1 22.45,98.37 31.79,89.04 U1.64
DC_BLOCKED_IN<0>: length 33.8
  TOP w0.18: U1.238 69.3,89.54 69.71,89.95 69.71,94.35 70.42,95.06 74.22,95.06 82.5,103.34 86.56,103.34 90.04,106.82 CN16.7
DC_BLOCKED_IN<1>: length 32.6
  TOP w0.18: CN16.5 89.24,106.8 86.38,103.94 82.59,103.94 74.08,95.43 70.01,95.43 69.25,94.68 69.25,90.6 68.69,90.04 U1.239
DC_BLOCKED_IN<2>: length 31.7
  TOP w0.18: CN16.3 88.44,107.02 85.96,104.54 82.68,104.54 73.99,95.84 68.09,95.84 67.24,95 U1.240
DC_BLOCKED_IN<3>: length 30.9
  TOP w0.18: CN16.1 87.64,107.32 85.46,105.14 82.74,105.14 73.86,96.26 65.91,96.26 65,95.35 U1.1
DC_BLOCKED_IN<4>: length 29.2
  TOP w0.18: CN15.7 85.02,106.7 83.96,105.64 82.73,105.64 73.71,96.62 65.76,96.62 64.5,95.36 U1.2
DC_BLOCKED_IN<5>: length 28.8
  TOP w0.18: U1.3 64,95.37 65.61,96.98 73.56,96.98 82.72,106.14 83.46,106.14 84.22,106.9 CN15.5
DC_BLOCKED_IN<6>: length 28.2
  TOP w0.18: CN15.3 83.42,107.35 73.41,97.34 65.46,97.34 63.5,95.38 U1.4
DC_BLOCKED_IN<7>: length 28.1
  TOP w0.18: CN15.1 82.62,107.06 73.26,97.7 65.31,97.7 63,95.39 63,94.2 U1.5
DC_BLOCKED_IN<8>: length 27.2
  TOP w0.18: U1.6 62.5,95.4 65.2,98.09 73.03,98.09 73.06,98.12 73.07,98.12 80,105.05 CN14.7
DC_BLOCKED_IN<9>: length 27
  TOP w0.18: U1.7 62,95.41 65.08,98.48 72.92,98.48 79.2,104.76 CN14.5
DC_BLOCKED_IN<10>: length 26.9
  TOP w0.18: U1.8 61.5,95.42 64.93,98.84 72.72,98.84 78.4,104.52 CN14.3
DC_BLOCKED_IN<11>: length 26.7
  TOP w0.18: U1.9 61,95.42 64.78,99.2 72.46,99.2 77.6,104.34 CN14.1
DC_BLOCKED_IN<12>: length 25.7
  TOP w0.18: U1.10 60.5,94.2 60.51,94.21 60.51,95.44 64.65,99.58 72.21,99.58 74.97,102.34 CN13.7
DC_BLOCKED_IN<13>: length 25.6
  TOP w0.18: CN13.5 74.17,102.1 72.05,99.97 64.53,99.97 59.99,95.43 59.99,94.22 60,94.2 U1.11
DC_BLOCKED_IN<14>: length 25.5
  TOP w0.18: U1.12 59.5,95.45 64.41,100.36 71.93,100.36 73.37,101.81 CN13.3
DC_BLOCKED_IN<15>: length 25.3
  TOP w0.18: CN13.1 72.57,101.56 71.76,100.75 64.29,100.75 59,95.46 U1.13
DC_BLOCKED_IN<16>: length 22
  TOP w0.18: U1.14 58.5,95.47 64.17,101.14 67.32,101.14 70.06,103.88 CN12.7
DC_BLOCKED_IN<17>: length 21.9
  TOP w0.18: U1.15 58,95.55 63.96,101.51 67.09,101.51 69.26,103.68 CN12.5
DC_BLOCKED_IN<18>: length 21.6
  TOP w0.18: U1.16 57.5,95.56 63.83,101.88 66.81,101.88 68.46,103.53 CN12.3
DC_BLOCKED_IN<19>: length 21.5
  TOP w0.18: CN12.1 67.66,103.34 66.63,102.31 63.74,102.31 57,95.57 U1.17
DC_BLOCKED_IN<20>: length 18.9
  TOP w0.18: U1.18 56.5,95.58 64.96,104.04 CN11.7
DC_BLOCKED_IN<21>: length 18.7
  TOP w0.18: CN11.5 64.16,103.75 56,95.59 U1.19
DC_BLOCKED_IN<22>: length 18.6
  TOP w0.18: U1.20 55.5,95.6 63.36,103.46 CN11.3
DC_BLOCKED_IN<23>: length 18.5
  TOP w0.18: U1.21 55,94.2 55,94.21 55,95.63 58.63,99.26 62.56,103.19 CN11.1
DC_BLOCKED_IN<24>: length 17.6
  TOP w0.18: CN10.7 59.9,101.04 54.5,95.64 U1.22
DC_BLOCKED_IN<25>: length 17.4
  TOP w0.18: U1.23 54,95.65 59.1,100.75 CN10.5
DC_BLOCKED_IN<26>: length 17.3
  TOP w0.18: CN10.3 58.3,100.46 53.5,95.66 U1.24
DC_BLOCKED_IN<27>: length 17.2
  TOP w0.18: CN10.1 57.5,100.17 53,95.67 U1.25
DC_BLOCKED_IN<28>: length 16.3
  TOP w0.18: CN9.7 54.88,98.97 52.5,96.59 U1.26
DC_BLOCKED_IN<29>: length 16.2
  TOP w0.18: CN9.5 54.08,98.74 52,96.66 U1.27
DC_BLOCKED_IN<30>: length 16.1
  TOP w0.18: U1.28 51.5,96.73 53.28,98.51 CN9.3
DC_BLOCKED_IN<31>: length 15.9
  TOP w0.18: U1.29 51,96.75 52.48,98.23 CN9.1
DC_BLOCKED_IN<32>: length 15.4
  TOP w0.18: U1.31 50,96.64 49.86,96.78 49.86,107.22 49.86,107.22 CN8.7
DC_BLOCKED_IN<33>: length 15.5
  TOP w0.18: CN8.5 49.06,97.18 49.5,96.74 U1.32
DC_BLOCKED_IN<34>: length 15.6
  TOP w0.18: CN8.3 48.26,107.22 48.26,107.22 48.26,97.38 49,96.64 U1.33
DC_BLOCKED_IN<35>: length 15.8
  TOP w0.18: CN8.1 47.46,97.58 48.5,96.54 U1.34
DC_BLOCKED_IN<36>: length 16.6
  TOP w0.18: U1.35 48,95.88 44.84,99.04 CN7.7
DC_BLOCKED_IN<37>: length 16.8
  TOP w0.18: CN7.5 44.04,107.48 44.06,107.46 44.06,98.64 44.6,98.1 45.4,97.3 47.5,95.2 U1.36
DC_BLOCKED_IN<38>: length 16.9
  TOP w0.18: U1.37 47,94.94 45.35,96.59 44.2,97.74 44.1,97.84 43.99,97.95 43.24,98.7 CN7.3
DC_BLOCKED_IN<39>: length 17
  TOP w0.18: U1.38 46.5,94.9 43.81,97.59 43.81,97.59 42.44,98.97 CN7.1
DC_BLOCKED_IN<40>: length 17.9
  TOP w0.18: CN6.7 39.81,101.03 43.32,97.53 43.56,97.29 43.69,97.16 46,94.85 U1.39
DC_BLOCKED_IN<41>: length 18
  TOP w0.18: CN6.5 39.01,101.32 43.11,97.22 45.5,94.84 U1.40
DC_BLOCKED_IN<42>: length 18.1
  TOP w0.18: U1.41 45,94.83 38.59,101.23 38.58,101.23 38.21,101.61 CN6.3
DC_BLOCKED_IN<43>: length 18.3
  TOP w0.18: U1.42 44.5,94.82 42.82,96.5 42.79,96.53 42.69,96.63 38.45,100.87 38.44,100.87 37.41,101.9 CN6.1
DC_BLOCKED_IN<44>: length 20
  TOP w0.18: U1.43 44,94.81 38.3,100.51 38.29,100.51 37.02,101.78 35.62,101.78 34.79,102.61 CN5.7
DC_BLOCKED_IN<45>: length 20.3
  TOP w0.18: U1.44 43.5,94.8 38.15,100.15 38.14,100.15 36.87,101.42 35.08,101.42 33.99,102.51 CN5.5
DC_BLOCKED_IN<46>: length 20.5
  TOP w0.18: CN5.3 33.19,102.68 34.81,101.06 36.72,101.06 37.99,99.79 38,99.79 43,94.79 U1.45
DC_BLOCKED_IN<47>: length 20.8
  TOP w0.18: CN5.1 32.39,102.61 34.3,100.7 36.57,100.7 37.84,99.43 37.85,99.43 42.5,94.78 U1.46
DC_BLOCKED_IN<48>: length 24.1
  TOP w0.18: CN4.7 29.77,107.48 29.76,107.47 29.76,100.64 30.06,100.34 36.43,100.34 37.69,99.07 37.7,99.07 42,94.77 U1.47
DC_BLOCKED_IN<49>: length 24.4
  TOP w0.18: CN4.5 28.97,100.73 29.72,99.98 36.28,99.98 37.54,98.71 37.55,98.71 41.5,94.76 U1.48
DC_BLOCKED_IN<50>: length 24.6
  TOP w0.18: U1.49 41,94.74 38.44,97.3 38.44,97.3 36.13,99.62 29.38,99.62 28.17,100.83 CN4.3
DC_BLOCKED_IN<51>: length 24.8
  TOP w0.18: CN4.1 27.37,101.03 29.14,99.26 35.98,99.26 38.08,97.16 38.08,97.15 40.5,94.73 U1.50
DC_BLOCKED_IN<52>: length 25.8
  TOP w0.18: CN3.7 24.75,107.48 24.76,107.47 24.76,102.84 28.7,98.9 35.83,98.9 37.72,97.01 37.72,97 40,94.72 U1.51
DC_BLOCKED_IN<53>: length 26
  TOP w0.18: CN3.5 23.95,107.48 23.96,107.47 23.96,103.05 28.47,98.54 35.68,98.54 37.36,96.86 37.36,96.85 39.5,94.71 U1.52
DC_BLOCKED_IN<54>: length 26.1
  TOP w0.18: CN3.3 23.15,103.35 28.32,98.18 35.53,98.18 37,96.71 37,96.7 39,94.71 U1.53
DC_BLOCKED_IN<55>: length 26.2
  TOP w0.18: CN3.1 22.35,103.63 28.16,97.82 35.38,97.82 36.64,96.56 36.64,96.55 38.5,94.7 U1.54
DC_BLOCKED_IN<56>: length 27.1
  TOP w0.18: U1.55 38,94.61 35.15,97.46 28,97.46 19.72,105.73 CN2.7
DC_BLOCKED_IN<57>: length 27.1
  TOP w0.18: U1.56 37.5,94.48 34.88,97.1 27.85,97.1 18.92,106.02 CN2.5
DC_BLOCKED_IN<58>: length 27.3
  TOP w0.18: CN2.3 18.12,106.31 27.04,97.4 27.7,96.74 34.73,96.74 37,94.47 U1.57
DC_BLOCKED_IN<59>: length 27.4
  TOP w0.18: U1.58 36.5,94.46 34.58,96.38 27.55,96.38 27.31,96.62 17.32,106.6 17.32,107.48 17.32,107.48 CN2.1
DC_BLOCKED_IN<60>: length 29.2
  TOP w0.18: CN1.7 14.7,107.14 16.6,105.24 18.18,105.24 26.32,97.1 26.74,96.68 27.16,96.26 27.4,96.02 34.44,96.02 36,94.45 U1.59
DC_BLOCKED_IN<61>: length 29.6
  TOP w0.18: U1.60 35.5,94.45 34.29,95.66 27.17,95.66 18.19,104.64 16.16,104.64 13.9,106.9 CN1.5
DC_BLOCKED_IN<62>: length 30.3
  TOP w0.18: CN1.3 13.1,106.97 15.93,104.14 18.11,104.14 26.95,95.3 32.28,95.3 33.26,94.32 U1.61
DC_BLOCKED_IN<63>: length 30.8
  TOP w0.18: CN1.1 12.3,106.97 15.83,103.44 18.3,103.44 26.38,95.35 26.8,94.94 29.62,94.94 30.63,93.93 30.63,91.11 31.7,90.04 U1.62
EN_OTAG: length 15.3
  TOP w0.18: U1.213 68.55,77.04 70.57,79.06 73.37,79.06 74.64,77.79 79.58,77.79 80.09,77.29 LK58.1
G_DIODE: length 17.7
  TOP w0.18: U1.91 v1(35.32,75.54)
  L3 w0.18: v1(35.32,75.54) 33.69,75.54 33.49,75.34 29.59,75.34 28.71,76.22 25.62,76.22 25.15,75.76 LK25.1
  BOTTOM w0.18: v1(35.32,75.54) 35.35,75.5 C27.2
HOLD1: length 18.7
  TOP w0.18: LK62.1 22.82,84.91 25.62,82.11 29.93,82.11 30.51,81.54 U1.79
HOLD2: length 18.3
  TOP w0.18: LK65.1 22.57,82.87 23.69,81.75 28.31,81.75 28.96,81.1 31.28,81.1 31.46,80.92 31.46,80.91 31.83,80.54 U1.81
IB_INTEG: length 25.5
  TOP w0.18: U1.101 v1(35.66,70.54)
  L3 w0.18: v1(35.66,70.54) 35.22,70.1 35.22,70.1 31.72,66.6 30.79,66.6 30.05,65.86 27.39,65.86 26.12,64.59 LK44.1
  BOTTOM w0.18: v1(35.66,70.54) 36.51,70.54 C41.2
IB_SUM: length 24.5
  TOP w0.18: v1(64.19,77.34) 64.73,76.81 65.52,76.81 65.79,76.54 U1.212 68.67,76.54 70.76,78.63 73.04,78.63 74.38,77.29 79,77.29 80.01,76.27 LK38.1
  BOTTOM w0.18: C35.2 64.02,76.5 64.19,76.67 v1(64.19,77.34)
IB_W: length 21
  TOP w0.18: U1.209 68.49,75.04 68.6,75.14 68.9,75.14 69.14,75.38 v1(69.81,75.38) 70.95,76.52 73.11,76.52 74.55,75.09 74.55,74.58 74.89,74.24 LK34.1
  BOTTOM w0.18: C31.2 70.83,75.38 v1(69.81,75.38)
IBI_BUF: length 28.1
  TOP w0.18: v1(35.42,83.35) 34.73,84.04 U1.74
  L3 w0.18: LK31.1 26.12,93.29 32.22,87.19 32.22,86.55 v1(35.42,83.35)
  BOTTOM w0.18: C28.2 36.55,83.48 36.41,83.35 v1(35.42,83.35)
IBI_SS: length 21.8
  TOP w0.18: U1.70 34.51,86.04 35.08,86.61 v1(35.56,86.61)
  L3 w0.18: LK35.1 25.21,96.34 34.94,86.61 v1(35.56,86.61)
  BOTTOM w0.18: v1(35.56,86.61) 35.99,86.61 36.55,86.05 C32.2
